# Altium PCB COMM_V3.PcbDoc (part 1 of 5)
Units mm, origin at the board's own origin, x right, y up, seen from the top; angles counter-clockwise.
Board outline 93 x 90 mm, 6 copper layers (Top Layer, L2_GND, L3_PWR, L4_SIG, L5_GND, Bottom Layer), stack 1.634 mm thick; 271 components, 237 nets, 1362 pads, 1090 vias.
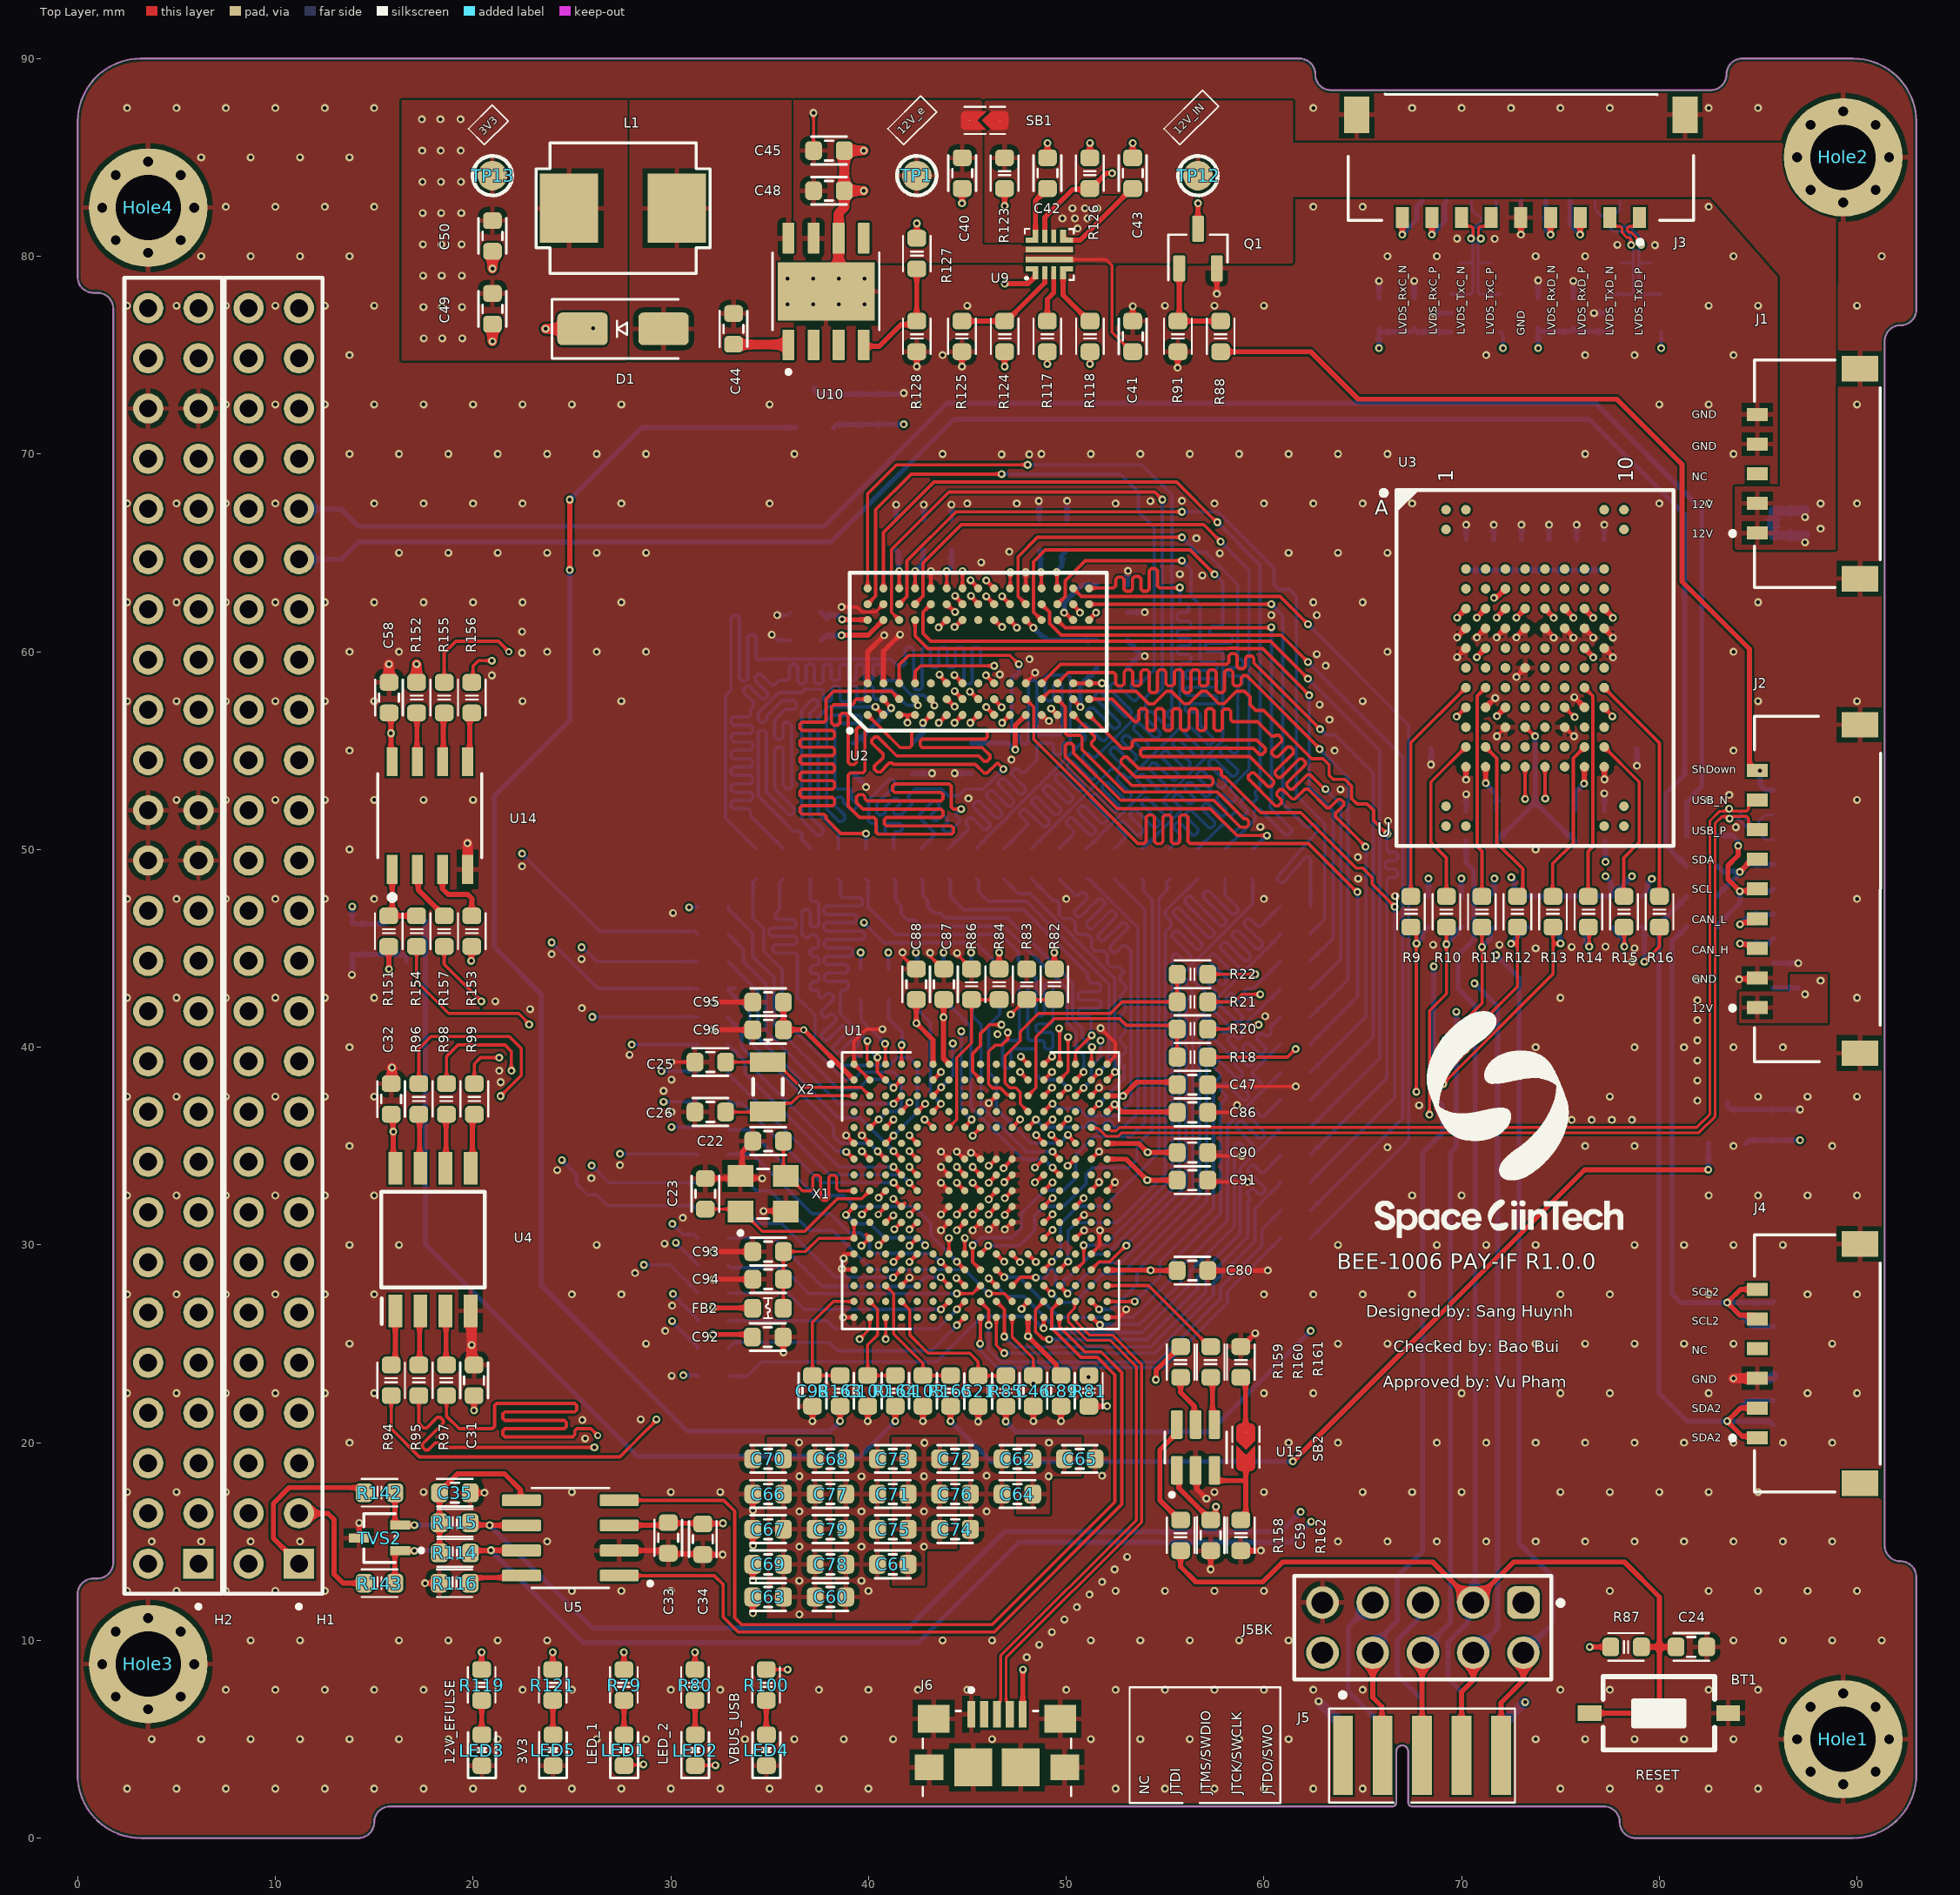
[diagram p0: Top Layer view]
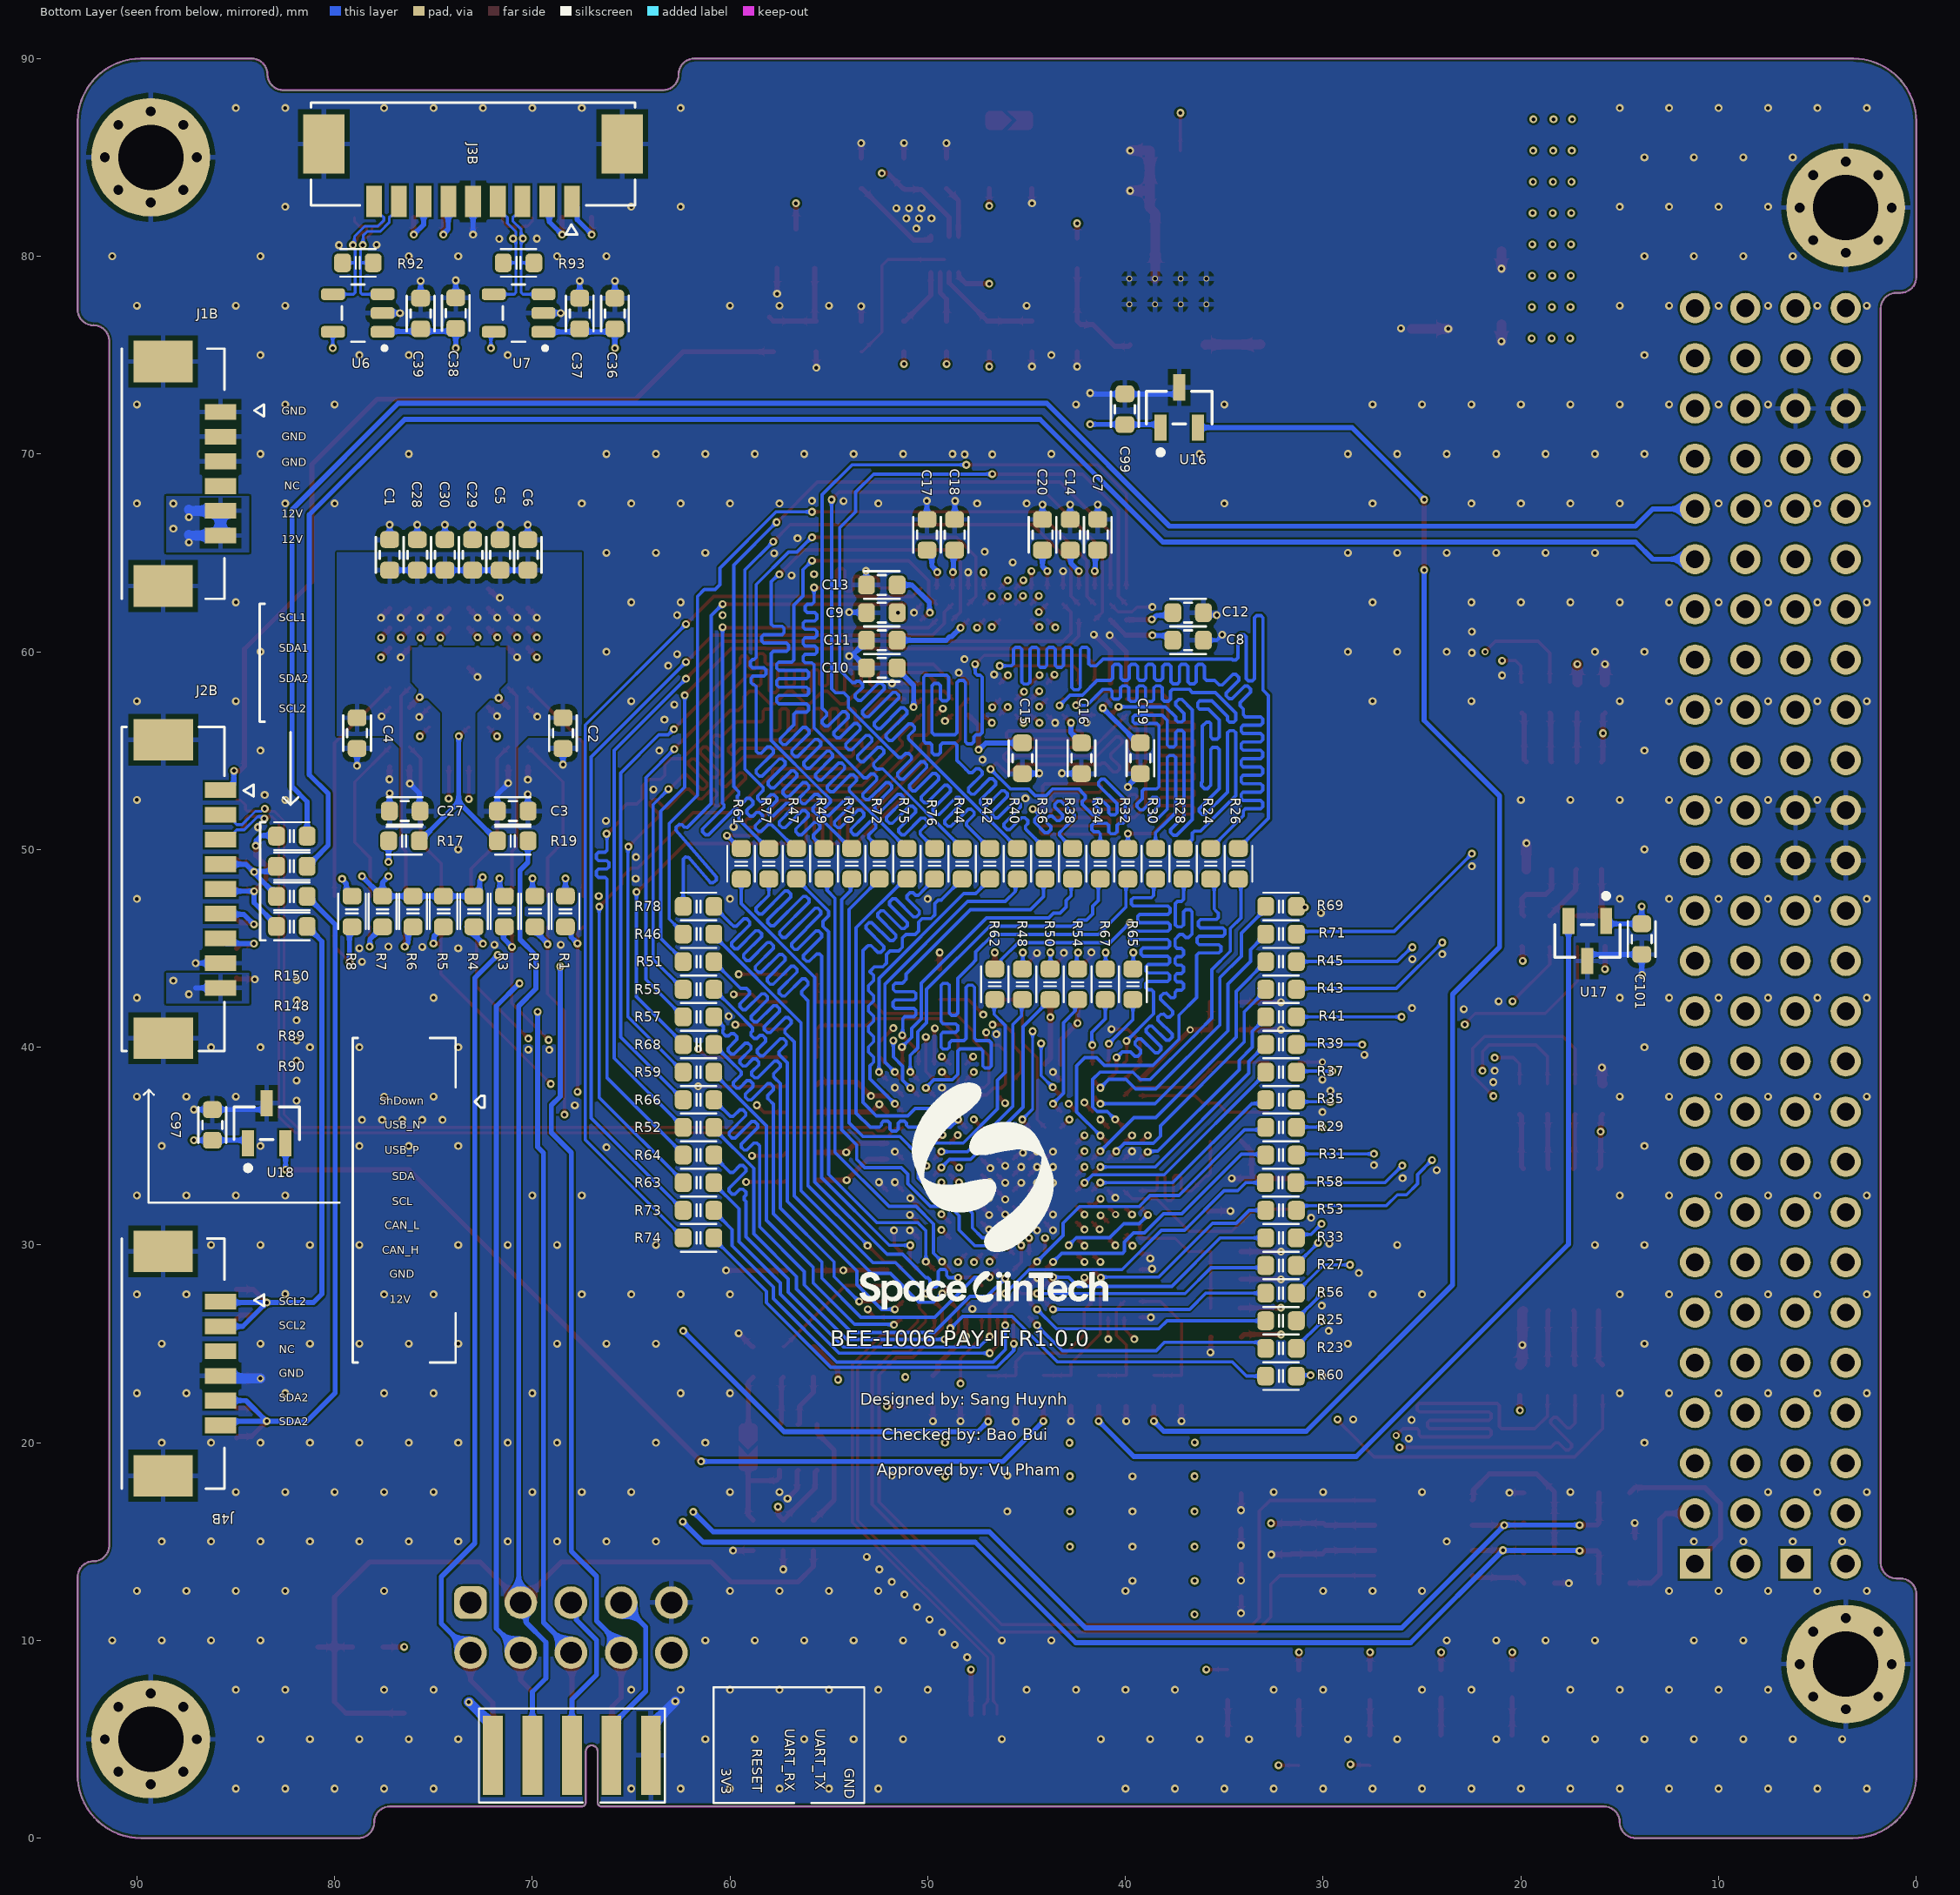
[diagram p1: Bottom Layer view, seen from below]
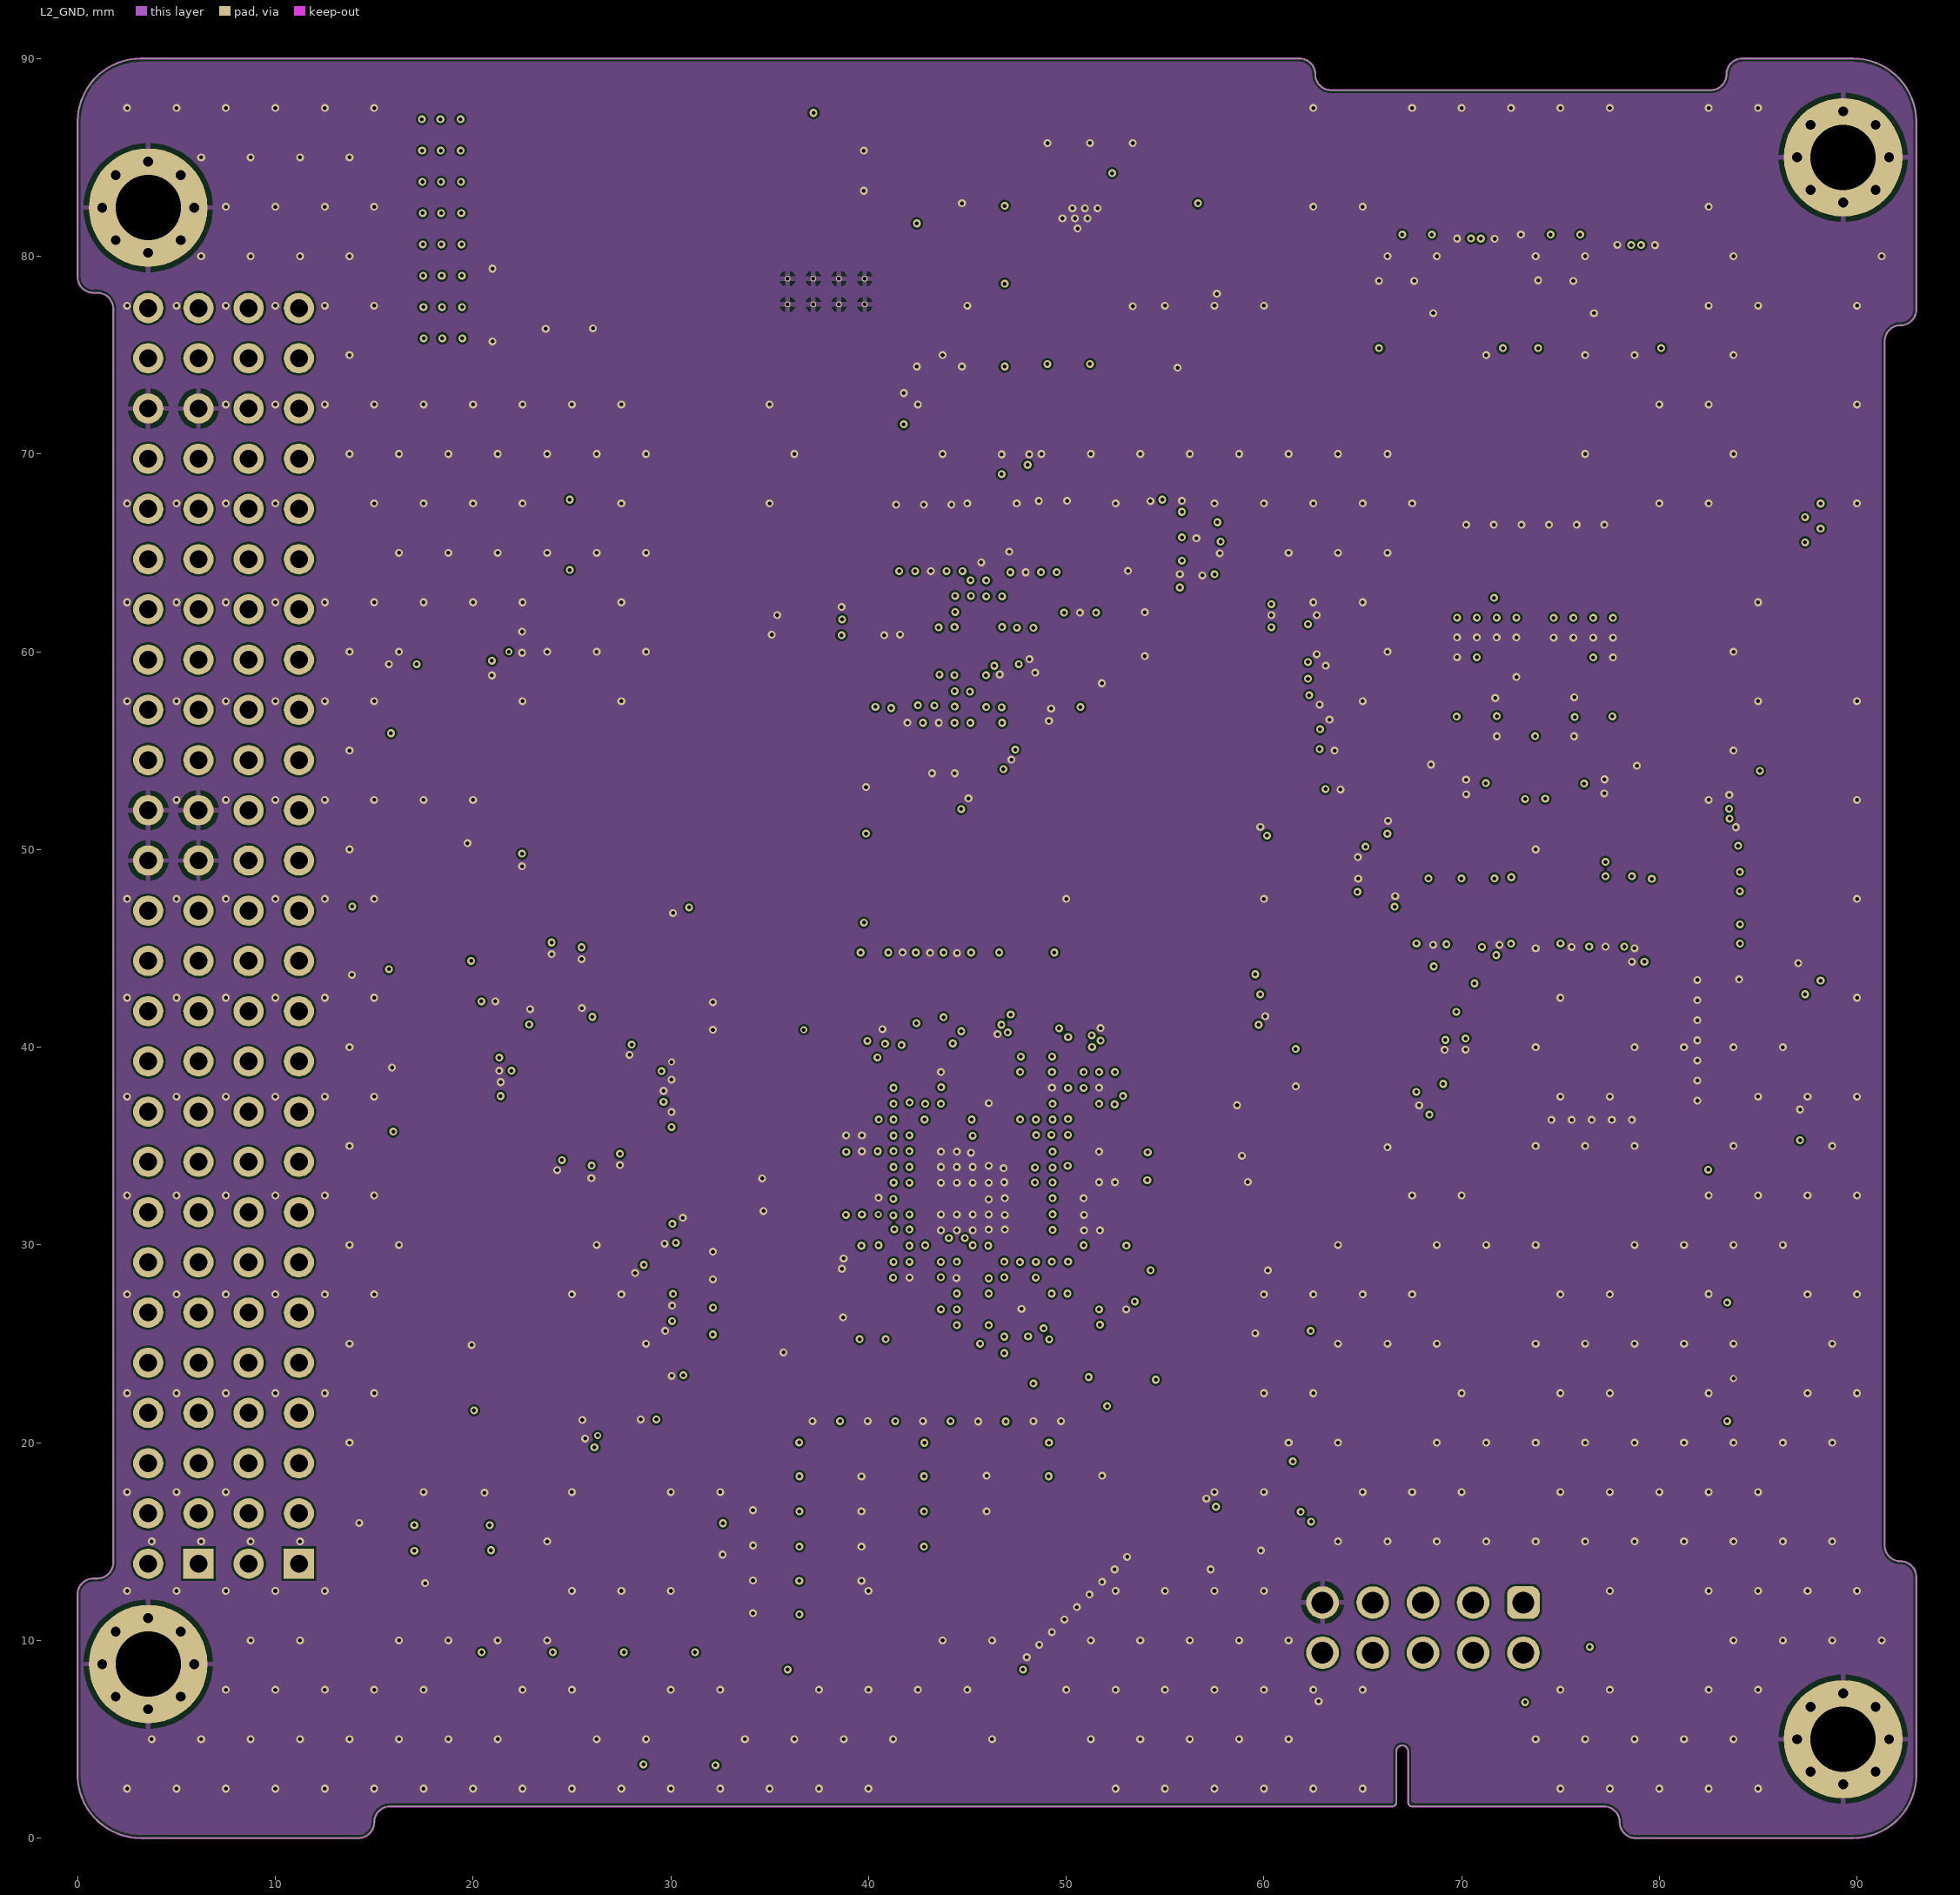
[diagram p2: L2_GND]
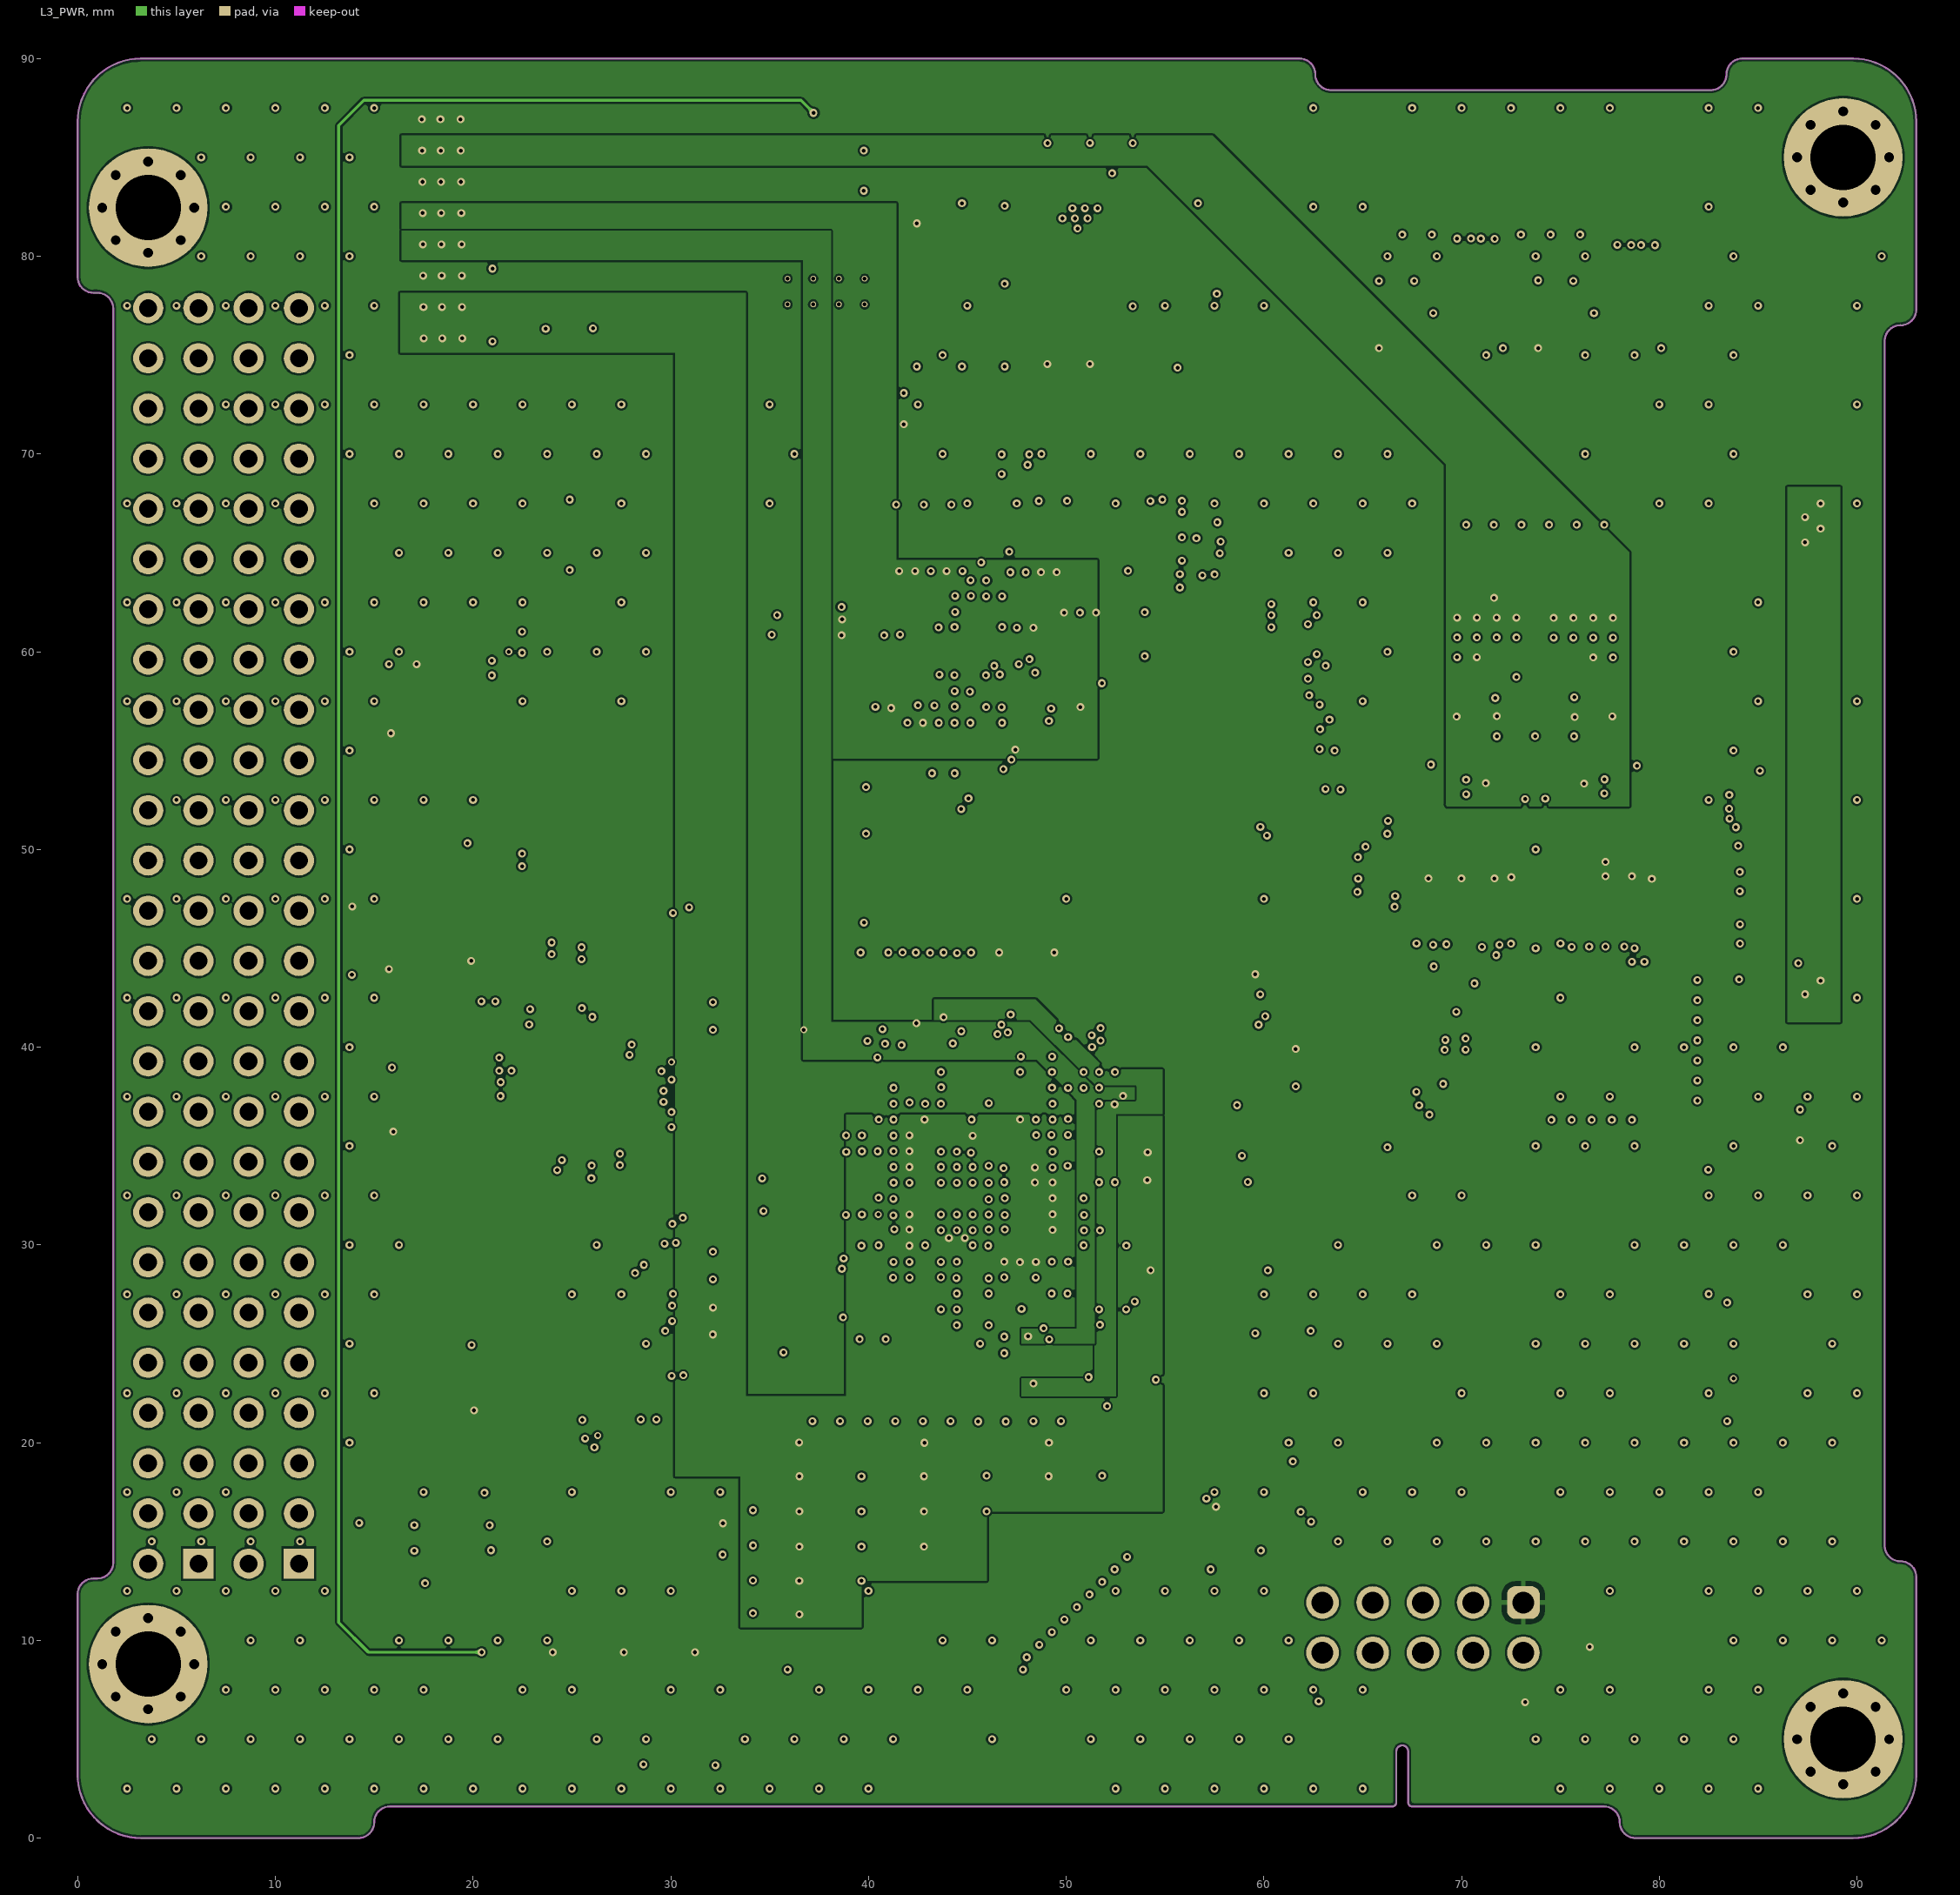
[diagram p3: L3_PWR]
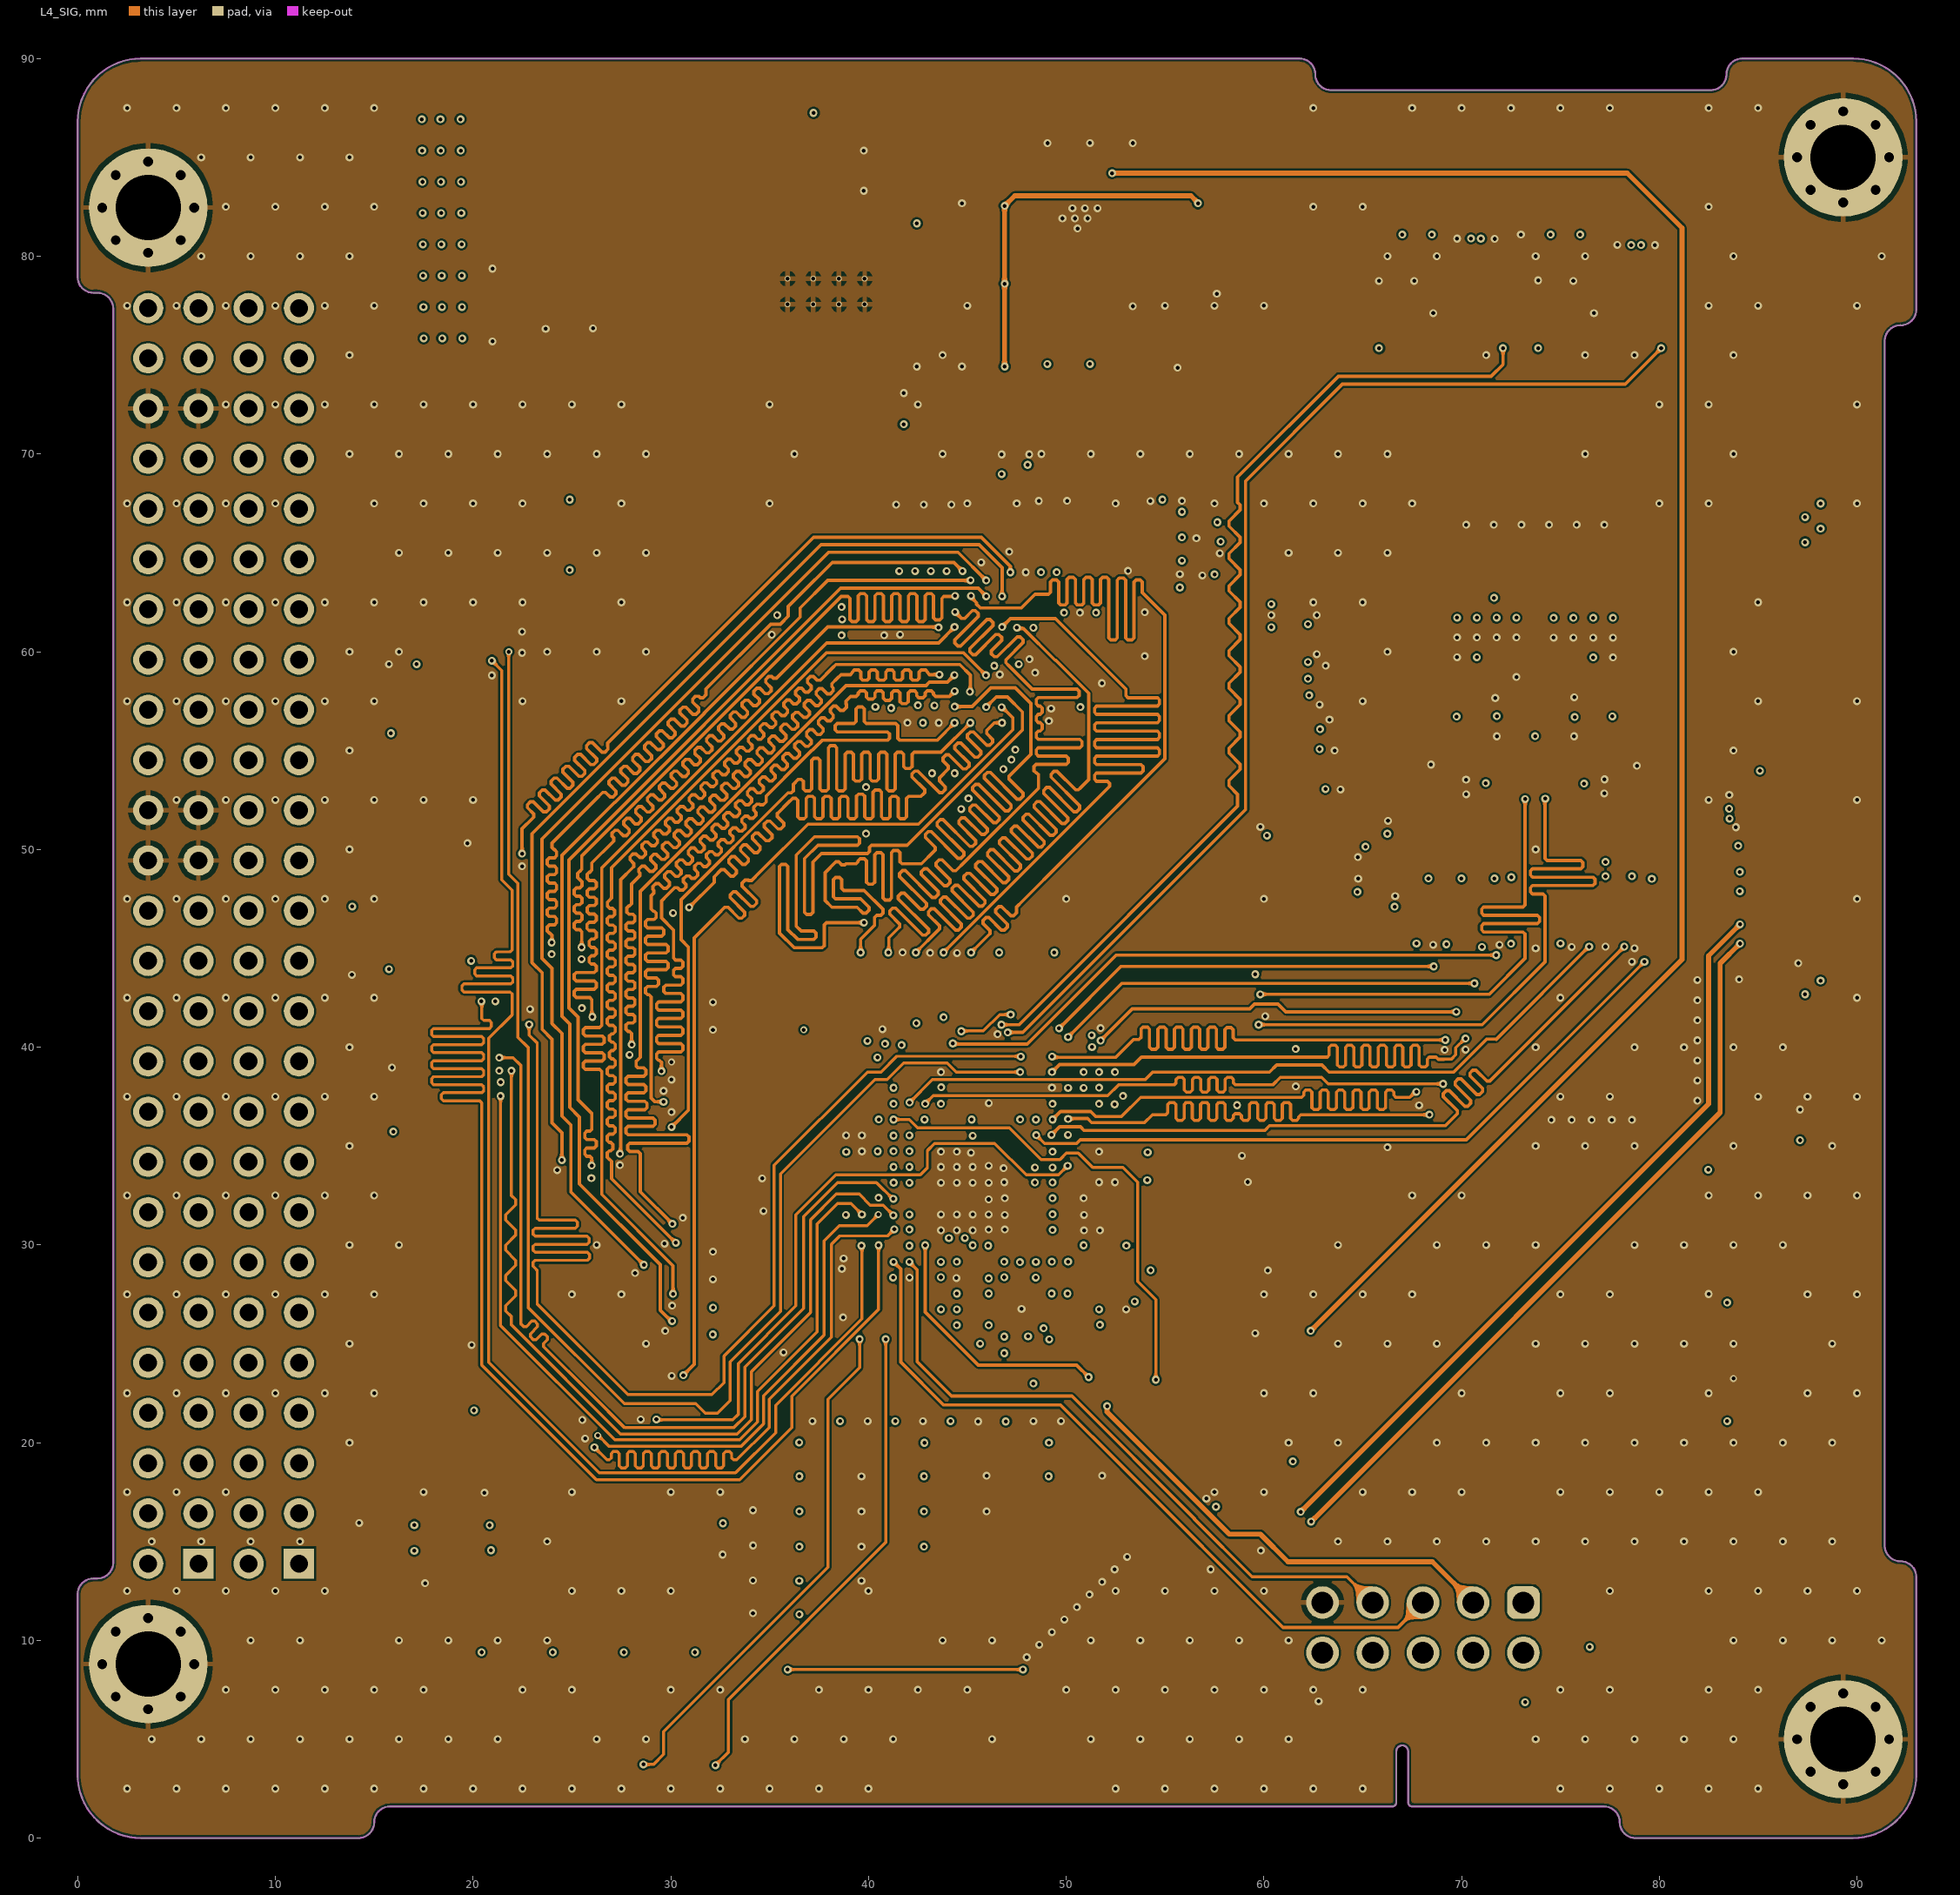
[diagram p4: L4_SIG]
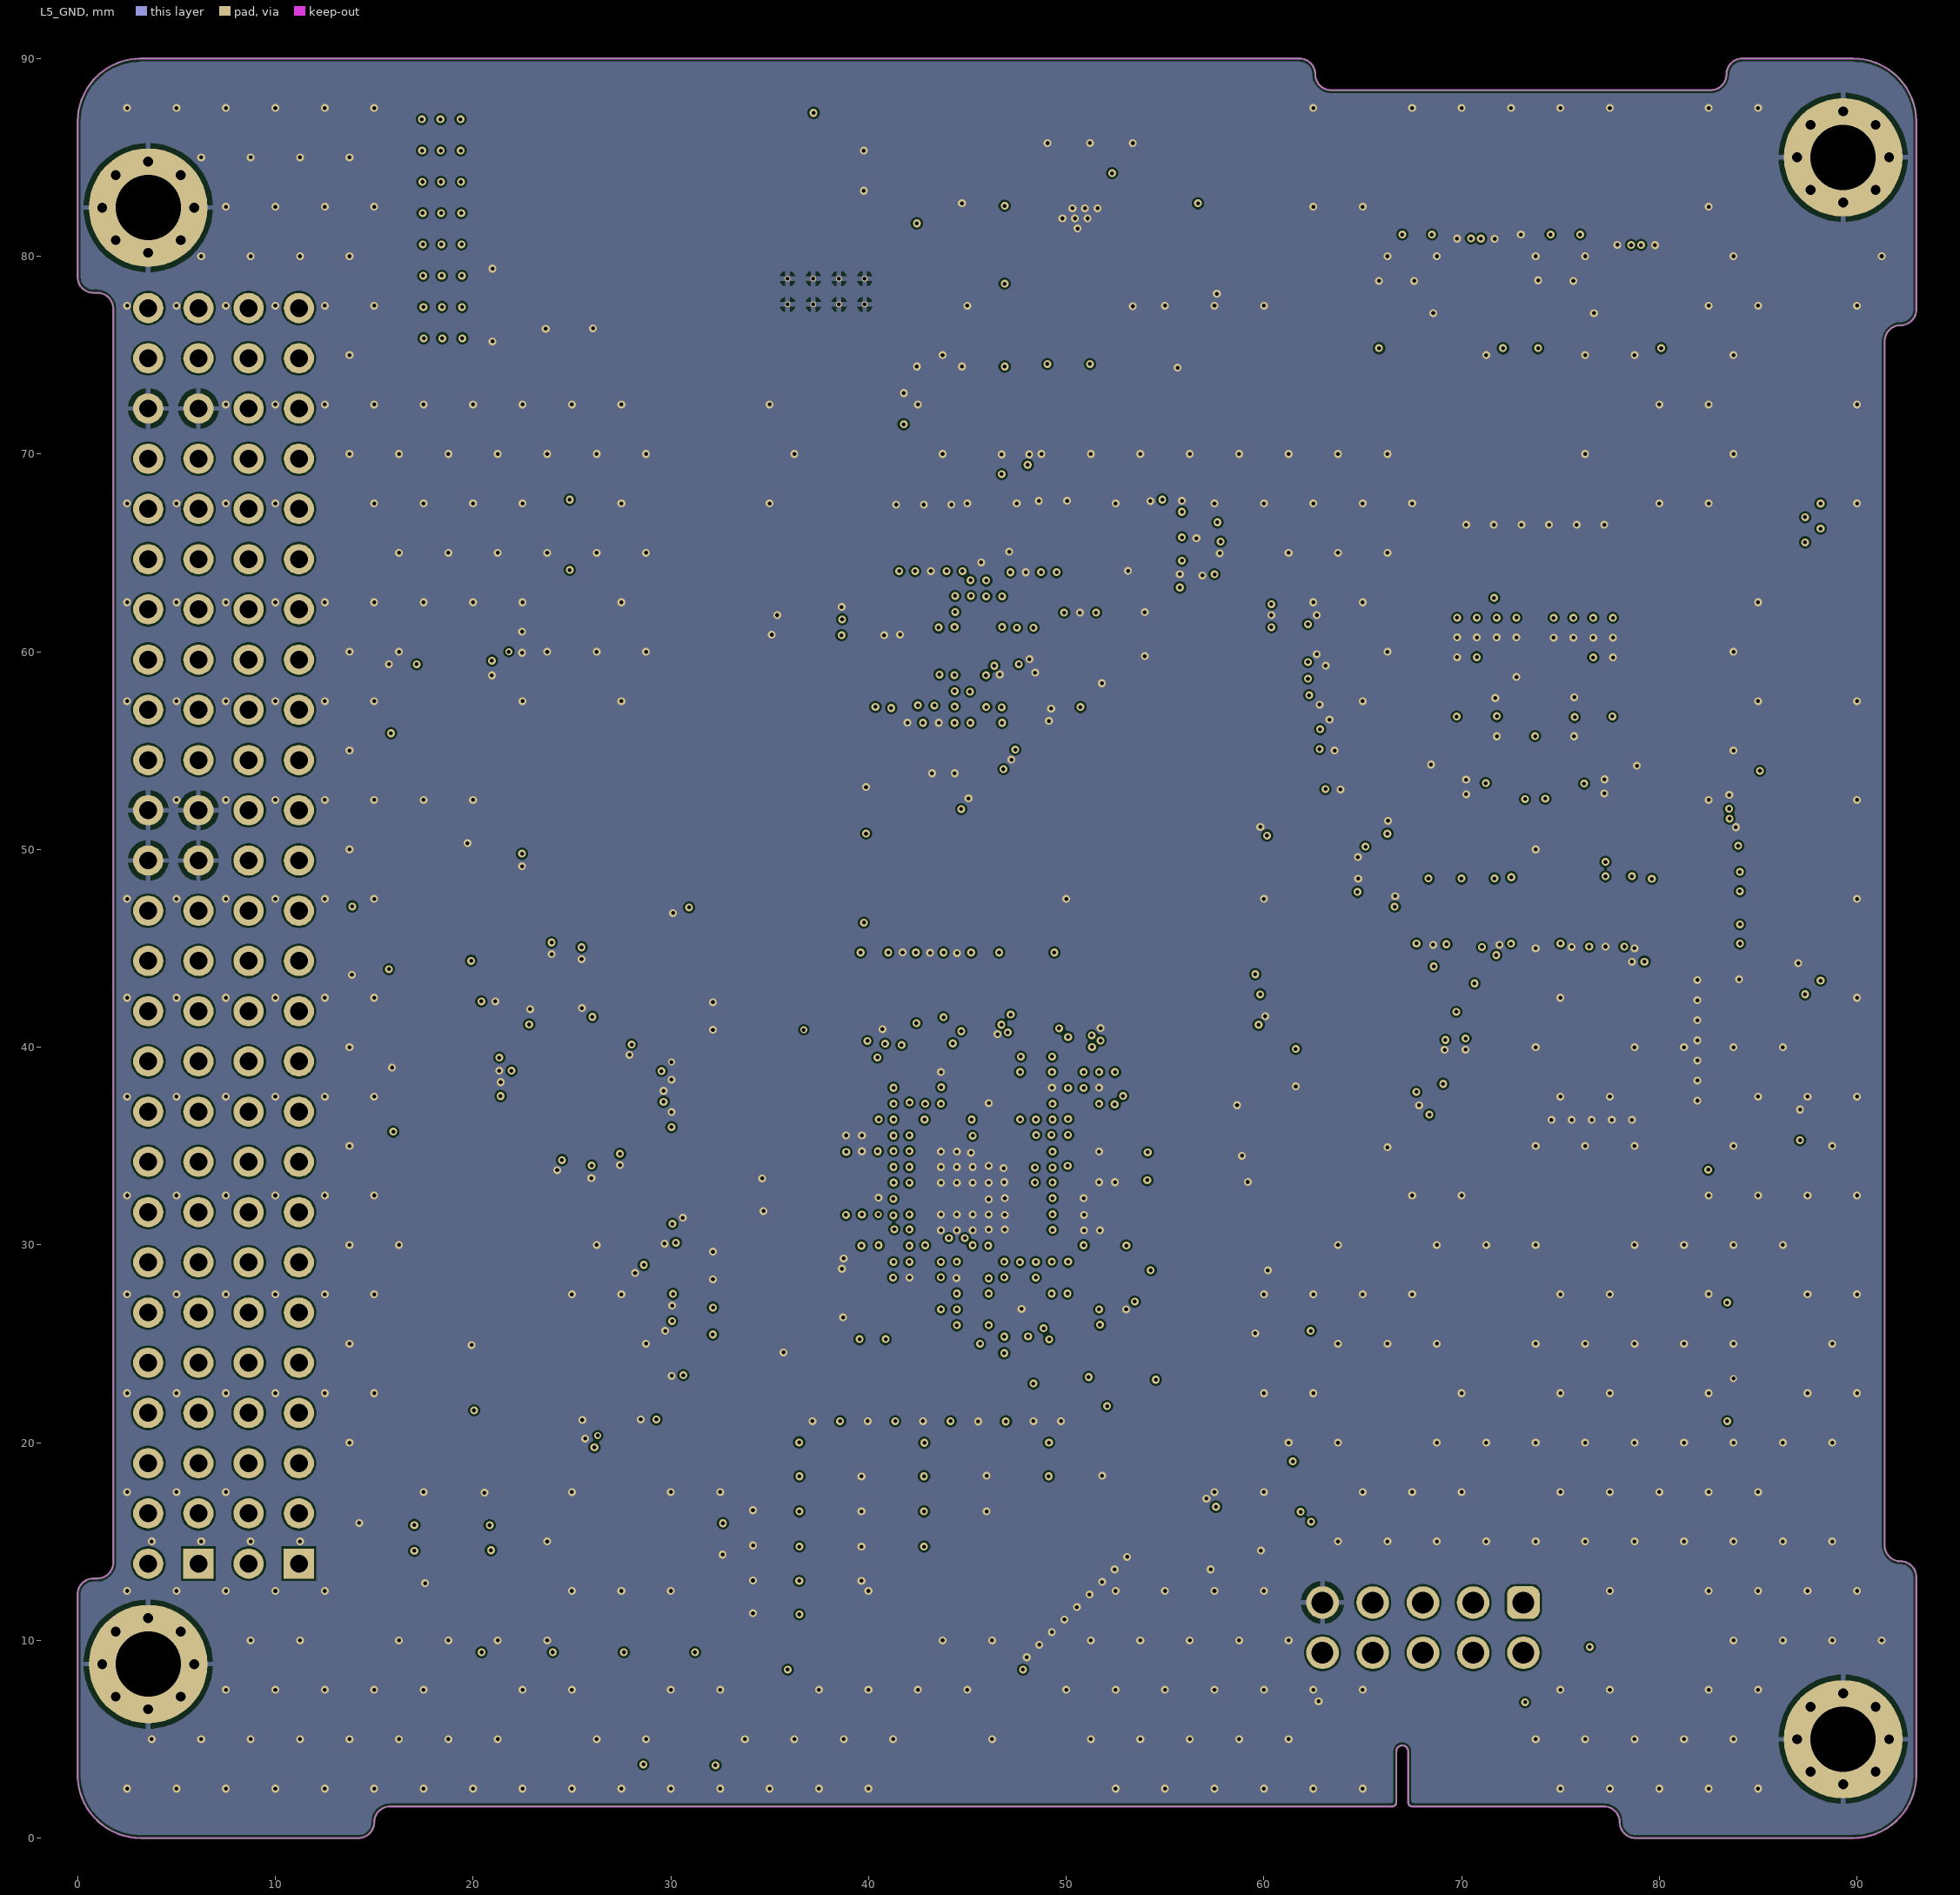
[diagram p5: L5_GND]
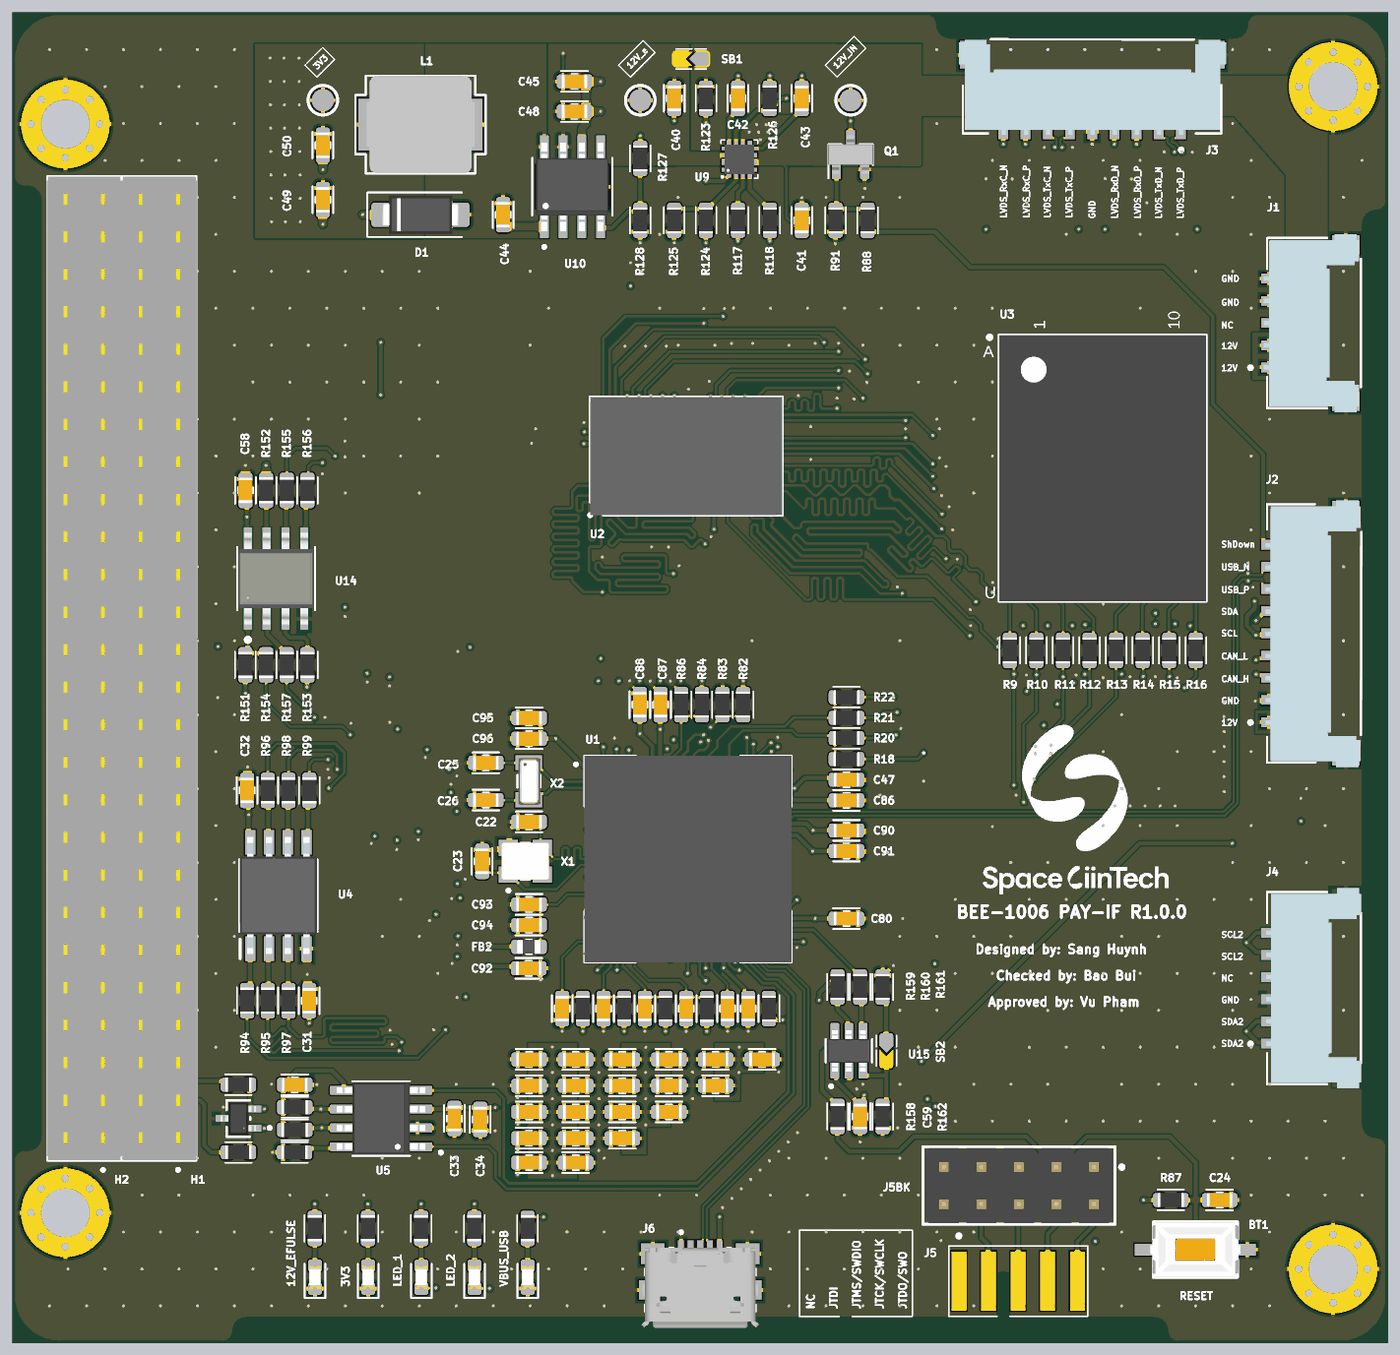
[diagram p10: 3D render of the assembled board from above, using the file's embedded part models]
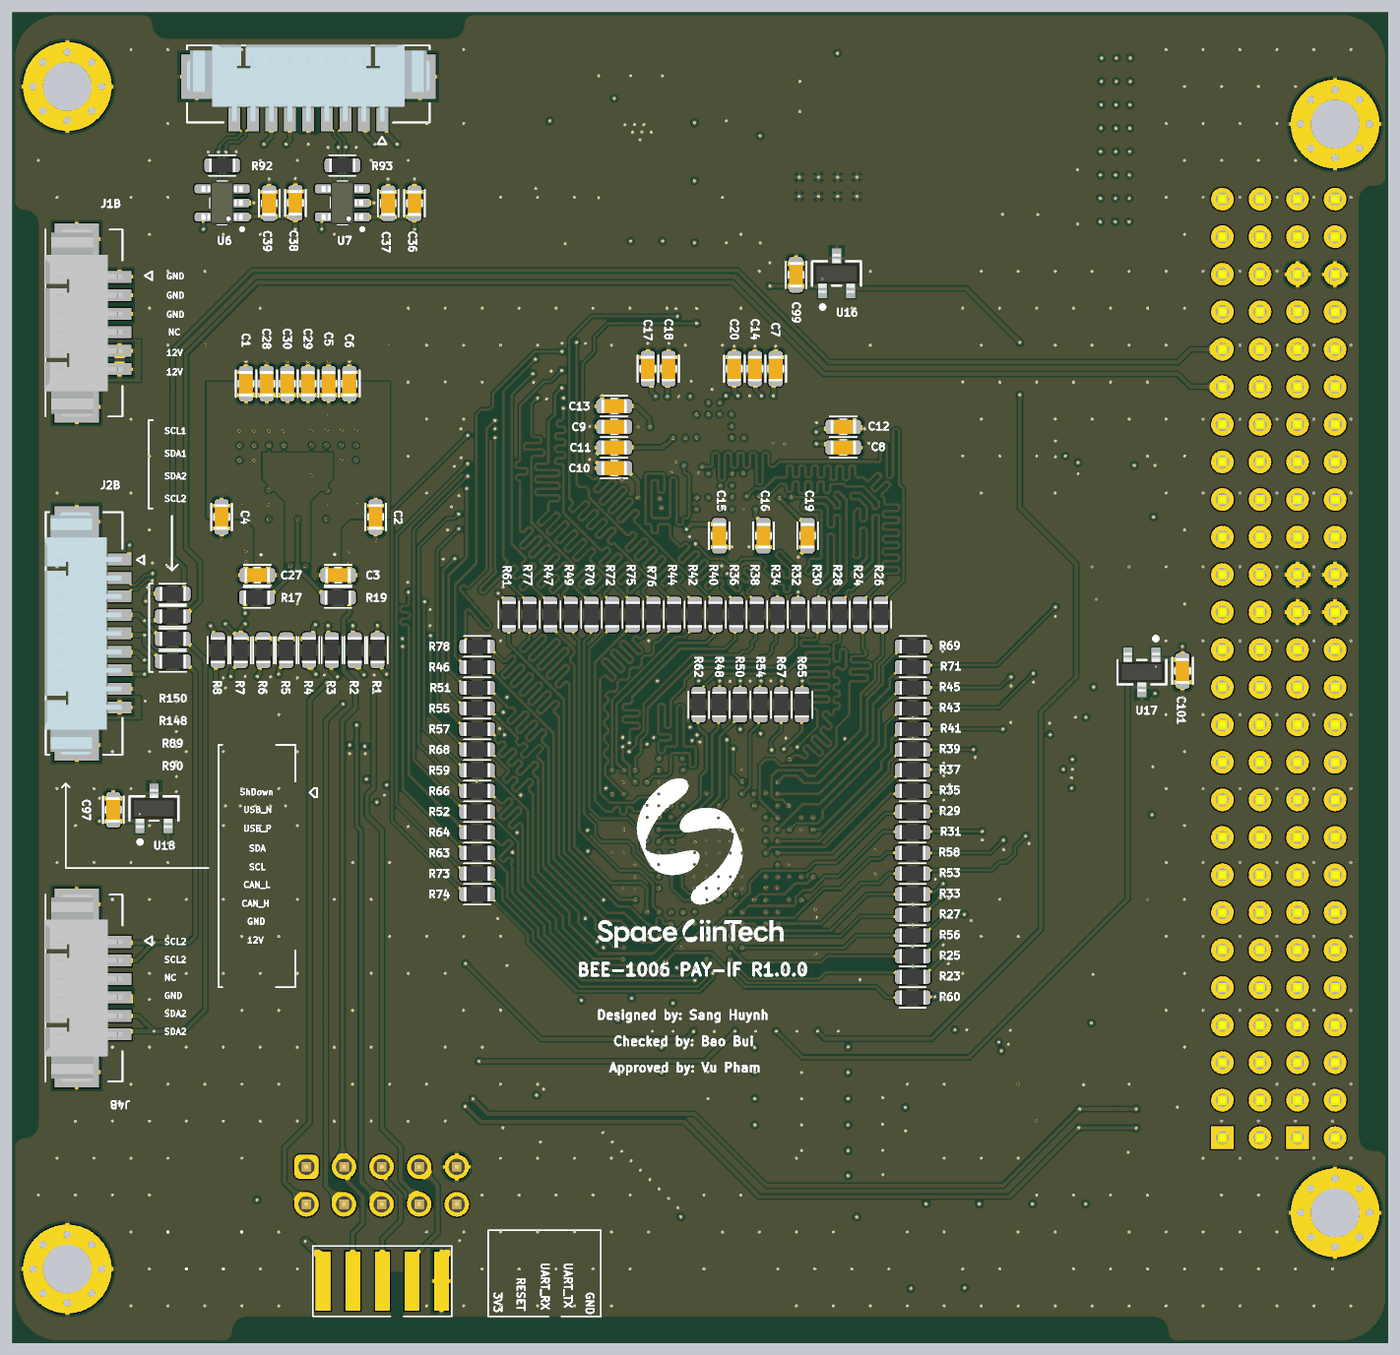
[diagram p11: 3D render of the assembled board from below, using the file's embedded part models]

## Layer stack, top to bottom
Top Solder: solder mask 0.0102, Solder Resist, Dk 3.5
Top Layer: signal copper 0.0457
Dielectric 2: core 0.0991, FR-4, Dk 3.9
L2_GND: signal copper 0.0305
Dielectric 3: prepreg 0.127, Dk 4.1
L3_PWR: signal copper 0.032
Dielectric 1: core 0.9652, FR-4, Dk 4.8
L4_SIG: signal copper 0.032
Dielectric 4: prepreg 0.127, Dk 4.1
L5_GND: signal copper 0.0305
Dielectric 5: core 0.0991, FR-4, Dk 3.9
Bottom Layer: signal copper 0.0457
Bottom Solder: solder mask 0.0102, Solder Resist, Dk 3.5

## Board outline
0,3.2 0,12.33 cw(c0.8,12.33) 0.8,13.13 1,13.13 ccw(c1,13.93) 1.8,13.93 1.8,77.35 ccw(c1,77.35) 1,78.15 0.8,78.15 cw(c0.8,78.95) 0,78.95 0,86.8 cw(c3.2,86.8) 3.193,90 3.2,90 61.8,90 cw(c61.8,89.2) 62.6,89.2 ccw(c63.4,89.2) 63.4,88.4 82.6,88.4 ccw(c82.6,89.2) 83.4,89.2 cw(c84.2,89.2) 84.2,90 89.8,90 89.807,90 cw(c89.8,86.8) 93,86.807 93,77.307 cw(c92.2,77.307) 92.2,76.507 ccw(c92.2,75.707) 91.4,75.707 91.4,14.8 ccw(c92.2,14.8) 92.2,14 cw(c92.2,13.2) 93,13.2 93,3.2 cw(c89.8,3.2) 89.8,0 78.8,0 cw(c78.8,0.8) 78,0.8 ccw(c77.2,0.8) 77.2,1.6 67.5,1.6 cw(c67.5,1.8) 67.3,1.8 67.3,4.387 ccw(c67,4.387) 66.7,4.387 66.7,1.8 cw(c66.5,1.8) 66.5,1.6 51,1.6 15.8,1.6 ccw(c15.8,0.8) 15,0.8 cw(c14.2,0.8) 14.2,0 3.2,0 cw(c3.2,3.2)

## Design rules (kind name [scope] priority, off if disabled: settings)
Clearance [All] p1: gap=0.102 ignorepadtopadclearanceinfootprint=TRUE
ComponentClearance ComponentClearance_PC104 [InComponent('H1') vs InComponent('H2')] p1: gap=0 collisioncheckmode=3 verticalgap=-15 showdistances=FALSE
ComponentClearance [All] p2: gap=0.254 collisioncheckmode=3 verticalgap=0.254 showdistances=FALSE
DiffPairsRouting DiffPairsRouting_USB [InDifferentialPairClass('All Differential Pairs')] p1: maxlimit=0.254 minlimit=0.127 mostfreqgap=0.127 toplayer_maxgap=0.127 toplayer_minwidth=0.141 toplayer_maxwidth=0.141 toplayer_prefwidth=0.141 midlayer2_maxgap=0.127 midlayer2_minwidth=0.093 midlayer2_maxwidth=0.093 midlayer2_prefwidth=0.093 midlayer3_maxgap=0.127 midlayer3_minwidth=0.093 midlayer3_maxwidth=0.093 midlayer3_prefwidth=0.093 bottomlayer_maxgap=0.127 bottomlayer_minwidth=0.141 bottomlayer_maxwidth=0.141 bottomlayer_prefwidth=0.141 impedanceprofiledriven=TRUE impedanceprofileid={6AAECBA1-2538-4FD8-8C3F-2CEA60D4070D} impedanceprofilevalue=90.000000 maxuncoupledlength=12.7
DiffPairsRouting DiffPairsRouting_LVDS [InDifferentialPairClass('Diff_LVDS')] p2: maxlimit=0.127 minlimit=0.127 mostfreqgap=0.127 toplayer_minwidth=0.141 toplayer_maxwidth=0.141 toplayer_prefwidth=0.141 midlayer2_minwidth=0.093 midlayer2_maxwidth=0.093 midlayer2_prefwidth=0.093 midlayer3_minwidth=0.093 midlayer3_maxwidth=0.093 midlayer3_prefwidth=0.093 bottomlayer_minwidth=0.141 bottomlayer_maxwidth=0.141 bottomlayer_prefwidth=0.141 impedanceprofiledriven=TRUE impedanceprofileid={6AAECBA1-2538-4FD8-8C3F-2CEA60D4070D} impedanceprofilevalue=90.000000 maxuncoupledlength=12.7
DiffPairsRouting [All] p3: maxlimit=0.254 minlimit=0.127 mostfreqgap=0.127 toplayer_maxgap=0.127 toplayer_minwidth=0.141 toplayer_maxwidth=0.141 toplayer_prefwidth=0.141 midlayer2_maxgap=0.127 midlayer2_minwidth=0.093 midlayer2_maxwidth=0.093 midlayer2_prefwidth=0.093 midlayer3_maxgap=0.127 midlayer3_minwidth=0.093 midlayer3_maxwidth=0.093 midlayer3_prefwidth=0.093 bottomlayer_maxgap=0.127 bottomlayer_minwidth=0.141 bottomlayer_maxwidth=0.141 bottomlayer_prefwidth=0.141 impedanceprofiledriven=TRUE impedanceprofileid={6AAECBA1-2538-4FD8-8C3F-2CEA60D4070D} impedanceprofilevalue=90.000000 maxuncoupledlength=12.7
HoleSize [All] p1: absolutevalues=TRUE maxlimit=5 minlimit=0.025 maxpercent=80.000 minpercent=20.000
HoleToHoleClearance [All] p1: gap=0.15 allowstackedmicrovias=TRUE
MatchedLengths MatchedLengths_FRAM [InxSignalClass('FRAM')] p1: tolerance=2.54 checknetsindiffpair=FALSE checkdiffpairvsdiffpair=TRUE checkxsignals=TRUE checkothers=TRUE
MatchedLengths MatchedLengths_MRAM [InxSignalClass('MRAM')] p2: tolerance=5 checknetsindiffpair=FALSE checkdiffpairvsdiffpair=TRUE checkxsignals=TRUE checkothers=TRUE
MatchedLengths MatchedLengths_LVDS_SPI [InNetClass('LVDS_SPI')] p3: tolerance=2.54 checknetsindiffpair=FALSE checkdiffpairvsdiffpair=TRUE checkxsignals=TRUE checkothers=TRUE
MatchedLengths MatchedLengths_SDRAM [InxSignalClass('SDRAM')] p4: tolerance=5 checknetsindiffpair=FALSE checkdiffpairvsdiffpair=TRUE checkxsignals=TRUE checkothers=TRUE
MatchedLengths MatchedLengths_SDRAM_A&BA [InxSignalClass('SDRAM_A&BA')] p5: tolerance=2.54 checknetsindiffpair=FALSE checkdiffpairvsdiffpair=TRUE checkxsignals=TRUE checkothers=TRUE
MatchedLengths MatchedLengths_eMMC [InxSignalClass('eMMC')] p6: tolerance=2.54 checknetsindiffpair=FALSE checkdiffpairvsdiffpair=TRUE checkxsignals=TRUE checkothers=TRUE
MatchedLengths MatchedLengths_SDRAM_D [InxSignalClass('SDRAM_D')] p7: tolerance=2.54 checknetsindiffpair=FALSE checkdiffpairvsdiffpair=TRUE checkxsignals=TRUE checkothers=TRUE
MinimumSolderMaskSliver [All] p1: minsoldermaskwidth=0.11
PolygonConnect PolygonConnect_Vias [IsVia] p1: connectstyle=Direct reliefconductorwidth=0.254 reliefentries=4 polygonreliefangle="90 Angle" airgapwidth=0.254
PolygonConnect [All] p2: connectstyle=Relief reliefconductorwidth=0.254 reliefentries=4 polygonreliefangle="90 Angle" airgapwidth=0.254
RoutingVias [All] p1: holewidth=0.2 width=0.35 viastyle="Through Hole" minholewidth=0.2 minwidth=0.35 maxholewidth=0.4 maxwidth=0.5
SilkToSilkClearance [All] p1: silktosilkclearance=0.127
SilkToSolderMaskClearance [IsPad] p1: minsilkscreentomaskgap=0.11 clearancetoexposedcopper=TRUE
SolderMaskExpansion SolderMaskExpansion_Vias [IsVia] p1: expansion=0.102 istentingtop=TRUE
SolderMaskExpansion [All] p2: expansion=0.102 istentingtop=FALSE
Width Width_S50 [InNetClass('Single_Ended')] p1: maxlimit=0.17 minlimit=0.15 preferedwidth=0.254 toplayer_minwidth=0.168 toplayer_prefwidth=0.169 midlayer2_minwidth=0.151 midlayer2_maxwidth=0.153 midlayer2_prefwidth=0.152 midlayer3_minwidth=0.151 midlayer3_maxwidth=0.153 midlayer3_prefwidth=0.152 bottomlayer_minwidth=0.168 bottomlayer_prefwidth=0.169 impedanceprofiledriven=TRUE impedanceprofileid={9A71E23D-52CF-4875-86DD-583C4774CC7E} impedanceprofilevalue=50.000000 minimp=50.000000 maximp=50.000000 favimp=50.000000 checkconnectedcopper=TRUE
Width [All] p2: maxlimit=0.5 minlimit=0.152 preferedwidth=0.254
23 further rules are at their usual default settings.

## Classes and differential pairs
net class N000-1_[0..3]: MRAM_IO0 MRAM_IO1 MRAM_IO2 MRAM_IO3
component class MRAM: C31 C32 R94 R95 R96 R97 R98 R99 U4
component class TEMP_CTRL: C97 C98 C99 C100 C101 C103 R163 R164 R165 U16 U17 U18
net class SDRAM_D[0..31]: SDRAM_D0 SDRAM_D1 SDRAM_D2 SDRAM_D3 SDRAM_D4 SDRAM_D5 SDRAM_D6 SDRAM_D7 SDRAM_D8 SDRAM_D9 SDRAM_D10 SDRAM_D11 SDRAM_D12 SDRAM_D13 SDRAM_D14 SDRAM_D15 SDRAM_D16 SDRAM_D17 SDRAM_D18 SDRAM_D19 SDRAM_D20 SDRAM_D21 SDRAM_D22 SDRAM_D23 SDRAM_D24 SDRAM_D25 SDRAM_D26 SDRAM_D27 SDRAM_D28 SDRAM_D29 SDRAM_D30 SDRAM_D31
net class SDRAM_A[0..11]: SDRAM_A0 SDRAM_A1 SDRAM_A2 SDRAM_A3 SDRAM_A4 SDRAM_A5 SDRAM_A6 SDRAM_A7 SDRAM_A8 SDRAM_A9 SDRAM_A10 SDRAM_A11
net class SDIO1_D[0..7]: SDIO1_D0 SDIO1_D1 SDIO1_D2 SDIO1_D3 SDIO1_D4 SDIO1_D5 SDIO1_D6 SDIO1_D7
component class WATCHDOG: C59 R158 R159 R160 R161 R162 SB2 U15
component class USB_FS: g J6 LED4 R100
component class SDRAM: C7 C8 C9 C10 C11 C12 C13 C14 C15 C16 C17 C18 C19 C20 R23 R24 R25 R26 R27 R28 R29 R30 R31 R32 R33 R34 R35 R36 R37 R38 R39 R40 R41 R42 R43 R44 R45 R46 R47 R48 R49 R50 R51 R52 R53 R54 R55 R56 R57 R58 R59 R60 R61 R62 R63 R64 R65 R66 R67 R68 R69 R70 R71 R72 R73 R74 R75 R76 R77 R78 U2
component class POWER: C40 C41 C42 C43 C44 C45 C48 C49 C50 D1 J1 J1B L1 LED3 LED5 Q1 R88 R91 R117 R118 R119 R121 R123 R124 R125 R126 R127 R128 SB1 TP1 TP12 TP13 U9 U10
component class MCU: BT1 C21 C22 C23 C24 C25 C26 LED1 LED2 R79 R80 R81 R82 R83 R84 R85 R86 R87 U1 X1 X2
component class MCU_POWER: C46 C47 C60 C61 C62 C63 C64 C65 C66 C67 C68 C69 C70 C71 C72 C73 C74 C75 C76 C77 C78 C79 C80 C86 C87 C88 C89 C90 C91 C92 C93 C94 C95 C96 FB2
component class LVDS: 2 C36 C37 C38 C39 J3 J3B R92 R93 U6 U7
component class FRAM: C58 R151 R152 R153 R154 R155 R156 R157 U14
component class eMMC: C1 C2 C3 C4 C5 C6 C27 C28 C29 C30 R1 R2 R3 R4 R5 R6 R7 R8 R9 R10 R11 R12 R13 R14 R15 R16 R17 R18 R19 R20 R21 R22 U3
component class DEBUG: J5 J5BK
component class CONNECTOR: H1 H2 Hole1 Hole2 Hole3 Hole4 J2 J2B J4 J4B R89 R90 R142 R143 R148 R150
component class CAN: C33 C34 C35 R114 R115 R116 TVS2 U5
differential pair EXP_USB_FS: +EXP_USB_FS_P -EXP_USB_FS_N
differential pair COMM_USB_FS: +COMM_USB_FS_P -COMM_USB_FS_N
differential pair LVDS_TxD: +LVDS_TxD_P -LVDS_TxD_N
differential pair LVDS_TxC: +LVDS_TxC_P -LVDS_TxC_N

## Components (designator, comment, footprint, x,y, rotation, side; value= is the part's Value field where it differs from the comment)
BT1 "BT_NRST" SW2-SMD 79.982,6.314 r180 top value="SW chip 2 pin"
C1 "0.1uF/16V" CAP_C_1608X80 77.216,64.897 r270 bottom value=33pF
C2 "0.1uF/16V" CAP_C_1608X80 68.453,55.88 r90 bottom value=33pF
C3 "0.1uF/16V" CAP_C_1608X80 70.993,51.943 r0 bottom value=33pF
C4 "0.1uF/16V" CAP_C_1608X80 78.867,55.88 r90 bottom value=33pF
C5 "0.1uF/16V" CAP_C_1608X80 71.628,64.897 r270 bottom value=33pF
C6 "0.1uF/16V" CAP_C_1608X80 70.231,64.897 r270 bottom value=33pF
C7 "0.1uF/16V" CAP_C_1608X80 41.402,65.913 r270 bottom value=33pF
C8 "0.1uF/16V" CAP_C_1608X80 36.83,60.579 r0 bottom value=33pF
C9 "0.1uF/16V" CAP_C_1608X80 52.324,61.976 r180 bottom value=33pF
C10 "0.1uF/16V" CAP_C_1608X80 52.324,59.182 r180 bottom value=33pF
C11 "0.1uF/16V" CAP_C_1608X80 52.324,60.579 r180 bottom value=33pF
C12 "0.1uF/16V" CAP_C_1608X80 36.83,61.976 r0 bottom value=33pF
C13 "0.1uF/16V" CAP_C_1608X80 52.324,63.373 r180 bottom value=33pF
C14 "0.1uF/16V" CAP_C_1608X80 42.799,65.913 r270 bottom value=33pF
C15 "0.1uF/16V" CAP_C_1608X80 45.212,54.61 r90 bottom value=33pF
C16 "0.1uF/16V" CAP_C_1608X80 42.227,54.61 r90 bottom value=33pF
C17 "0.1uF/16V" CAP_C_1608X80 50.038,65.913 r270 bottom value=33pF
C18 "0.1uF/16V" CAP_C_1608X80 48.641,65.913 r270 bottom value=33pF
C19 "0.1uF/16V" CAP_C_1608X80 39.243,54.61 r90 bottom value=33pF
C20 "0.1uF/16V" CAP_C_1608X80 44.196,65.913 r270 bottom value=33pF
C21 "0.1uF/16V" CAP_C_1608X80 45.551,22.606 r90 top value=33pF
C22 "12pF/10V" CAP_C_1608X80 34.925,35.25 r0 top value=33pF
C23 "12pF/10V" CAP_C_1608X80 31.75,32.583 r270 top value=33pF
C24 "0.1uF/16V" CAP_C_1608X80 81.622,9.667 r180 top value=33pF
C25 "12pF/10V" CAP_C_1608X80 32,39.245 r0 top value=33pF
C26 "12pF/10V" CAP_C_1608X80 32,36.722 r0 top value=33pF
C27 "0.1uF/16V" CAP_C_1608X80 76.454,51.943 r180 bottom value=33pF
C28 "0.1uF/16V" CAP_C_1608X80 75.819,64.897 r270 bottom value=33pF
C29 "2.2uF/10V" CAP_C_1608X80 73.025,64.897 r270 bottom value=33pF
C30 "0.1uF/16V" CAP_C_1608X80 74.422,64.897 r270 bottom value=33pF
C31 "0.1uF/16V" CAP_C_1608X80 20.051,23.154 r270 top value=33pF
C32 "0.1uF/16V" CAP_C_1608X80 15.86,37.378 r270 top value=33pF
C33 "1uF/25V" CAP_C_1608X80 29.875,15.179 r270 top value=33pF
C34 "0.1uF/16V" CAP_C_1608X80 31.623,15.113 r270 top value=33pF
C35 "4.7nF/16V" CAP_C_1608X80 19.08,17.465 r0 top value=33pF
C36 "10uF/25V" CAP_C_1608X80 65.826,77.104 r270 bottom value=33pF
C37 "1uF/16V" CAP_C_1608X80 67.604,77.104 r270 bottom value=33pF
C38 "10uF/25V" CAP_C_1608X80 73.874,77.127 r270 bottom value=33pF
C39 "1uF/16V" CAP_C_1608X80 75.652,77.104 r270 bottom value=33pF
C40 "10uF/25V" CAP_C_1608X80 44.743,84.201 r90 top value=33pF
C41 "10uF/25V" CAP_C_1608X80 53.366,75.946 r270 top value=33pF
C42 "2.2nF/25V" CAP_C_1608X80 49.054,84.201 r270 top
C43 "2.2nF/25V" CAP_C_1608X80 53.366,84.201 r270 top
C44 "10nF/16V" CAP_C_1608X80 33.173,76.327 r270 top value=33pF
C45 "10uF/25V" CAP_C_1608X80 37.999,85.344 r180 top value=33pF
C46 "2.2uF/10V" CAP_C_1608X80 48.343,22.618 r90 top value=33pF
C47 "4.7uF/16V" CAP_C_1608X80 56.388,38.1 r0 top value=33pF
C48 "1uF/25V" CAP_C_1608X80 37.999,83.312 r180 top value=33pF
C49 "10uF/25V" CAP_C_1608X80 20.981,77.343 r90 top value=33pF
C50 "1uF/25V" CAP_C_1608X80 20.981,81.026 r90 top value=33pF
C58 "0.1uF/16V" CAP_C_1608X80 15.748,57.679 r270 top value=33pF
C59 "0.1uF/16V" CAP_C_1608X80 57.311,15.314 r90 top value=33pF
C60 "0.1uF/16V" CAP_C_1608X80 38.077,12.192 r180 top value=33pF
C61 "0.1uF/16V" CAP_C_1608X80 41.229,13.843 r0 top value=33pF
C62 "0.1uF/16V" CAP_C_1608X80 47.534,19.177 r0 top value=33pF
C63 "0.1uF/16V" CAP_C_1608X80 34.925,12.192 r0 top value=33pF
C64 "0.1uF/16V" CAP_C_1608X80 47.534,17.399 r0 top value=33pF
C65 "0.1uF/16V" CAP_C_1608X80 50.686,19.177 r180 top value=33pF
C66 "0.1uF/16V" CAP_C_1608X80 34.925,17.399 r0 top value=33pF
C67 "0.1uF/16V" CAP_C_1608X80 34.925,15.621 r0 top value=33pF
C68 "0.1uF/16V" CAP_C_1608X80 38.077,19.177 r180 top value=33pF
C69 "0.1uF/16V" CAP_C_1608X80 34.925,13.843 r0 top value=33pF
C70 "4.7uF/16V" CAP_C_1608X80 34.925,19.177 r180 top value=33pF
C71 "0.1uF/16V" CAP_C_1608X80 41.229,17.399 r0 top value=33pF
C72 "0.1uF/16V" CAP_C_1608X80 44.382,19.177 r180 top value=33pF
C73 "0.1uF/16V" CAP_C_1608X80 41.229,19.177 r0 top value=33pF
C74 "0.1uF/16V" CAP_C_1608X80 44.382,15.621 r180 top value=33pF
C75 "0.1uF/16V" CAP_C_1608X80 41.229,15.621 r0 top value=33pF
C76 "0.1uF/16V" CAP_C_1608X80 44.382,17.399 r180 top value=33pF
C77 "0.1uF/16V" CAP_C_1608X80 38.077,17.399 r180 top value=33pF
C78 "0.1uF/16V" CAP_C_1608X80 38.077,13.843 r180 top value=33pF
C79 "0.1uF/16V" CAP_C_1608X80 38.077,15.621 r180 top value=33pF
C80 "0.1uF/16V" CAP_C_1608X80 56.388,28.702 r180 top value=33pF
C86 "2.2uF/10V" CAP_C_1608X80 56.388,36.703 r180 top value=33pF
C87 "2.2uF/10V" CAP_C_1608X80 43.815,43.18 r270 top value=33pF
C88 "4.7uF/16V" CAP_C_1608X80 42.418,43.18 r90 top value=33pF
C89 "4.7uF/16V" CAP_C_1608X80 49.74,22.618 r270 top value=33pF
C90 "0.1uF/16V" CAP_C_1608X80 56.388,34.671 r180 top value=33pF
C91 "0.1uF/16V" CAP_C_1608X80 56.388,33.274 r180 top value=33pF
C92 "4.7uF/16V" CAP_C_1608X80 34.906,25.338 r0 top value=33pF
C93 "1uF/16V" CAP_C_1608X80 34.925,29.662 r0 top value=33pF
C94 "0.1uF/16V" CAP_C_1608X80 34.925,28.265 r0 top value=33pF
C95 "1uF/16V" CAP_C_1608X80 34.925,42.276 r0 top value=33pF
C96 "0.1uF/16V" CAP_C_1608X80 34.925,40.879 r0 top value=33pF
C97 "0.1uF/16V" CAP_C_1608X80 86.188,36.068 r270 bottom value=33pF
C98 "0.1uF/16V" CAP_C_1608X80 37.169,22.618 r90 top value=33pF
C99 "0.1uF/16V" CAP_C_1608X80 40.031,72.263 r270 bottom value=33pF
C100 "0.1uF/16V" CAP_C_1608X80 39.963,22.618 r90 top value=33pF
C101 "0.1uF/16V" CAP_C_1608X80 13.888,45.466 r90 bottom value=33pF
C103 "0.1uF/16V" CAP_C_1608X80 42.757,22.618 r90 top value=33pF
D1 "SS54" DO-214AC_SMA 27.585,76.327 r0 top value=SS34
FB2 "BLM18PG121SN1D" IND_1608X65 34.917,26.802 r0 top
H1 "ESQ-126-14-G-D" SAMTEC_ESQ-126-14-G-D 11.19,13.88 r90 top locked
H2 "ESQ-126-14-G-D" SAMTEC_ESQ-126-14-G-D 6.11,13.88 r90 top locked
Hole1 "hole_space" HOLE_SPACE 89.3,5 r0 top locked
Hole2 "hole_space" HOLE_SPACE 89.3,85 r0 top locked
Hole3 "hole_space" HOLE_SPACE 3.57,8.8 r0 top
Hole4 "hole_space" HOLE_SPACE 3.57,82.46 r0 top locked
J1 "5040500591" 5040500591 88,69 r270 top locked
J1B "532610671" MOLEX_532610671 88.173,69 r270 bottom
J2 "5040500991" 5040500991 88,48 r270 top locked
J2B "0532610971" 0532610971 88.17,48 r270 bottom
J3 "5040500991" 5040500991 73,85 r0 top
J3B "0532610971" 0532610971 73,85.173 r0 bottom
J4 "5040500691" 5040500691 88,24 r270 top
J4B "532610671" MOLEX_532610671 88.173,24 r270 bottom
J5 "009159010061911" 009159010061911 68,4.186 r90 top
J5BK "61301021121" 61301021121 68.047,10.643 r180 top
J6 "GMCB05321121BEU" AMPHENOL_GMCB05321121BEU 46.5,3.582 r0 top locked
L1 "SRP7050TA-220M" SRP7050TA-220M 27.585,82.423 r180 top
LED1 "150060BS75000" LED_0603 27.643,4.445 r270 top value="LED 3 - 5 ly 2 Colour"
LED2 "150060GS75000" LED_0603 31.241,4.445 r270 top value="LED 3 - 5 ly 2 Colour"
LED3 "150060RS75000" LED_0603 20.447,4.445 r270 top value="LED 3 - 5 ly 2 Colour"
LED4 "150060RS75000" LED_0603 34.838,4.445 r270 top value="LED 3 - 5 ly 2 Colour"
LED5 "150060YS75000" LED_0603 24.045,4.445 r270 top value="LED 3 - 5 ly 2 Colour"
Q1 "MMBT2222A" SOT95P240X120-3N 56.668,80.391 r90 top
R1 "10k" RES_C_1608X60 68.326,46.863 r90 bottom
R2 "10k" RES_C_1608X60 69.868,46.863 r90 bottom
R3 "10k" RES_C_1608X60 71.41,46.863 r90 bottom
R4 "10k" RES_C_1608X60 72.952,46.863 r90 bottom
R5 "10k" RES_C_1608X60 74.495,46.863 r90 bottom
R6 "10k" RES_C_1608X60 76.037,46.863 r90 bottom
R7 "10k" RES_C_1608X60 77.579,46.863 r90 bottom
R8 "10k" RES_C_1608X60 79.121,46.863 r90 bottom
R9 "22R" RES_C_1608X60 67.437,46.85 r90 top
R10 "22R" RES_C_1608X60 69.233,46.85 r90 top
R11 "22R" RES_C_1608X60 71.029,46.85 r90 top
R12 "22R" RES_C_1608X60 72.825,46.85 r90 top
R13 "22R" RES_C_1608X60 74.622,46.85 r90 top
R14 "22R" RES_C_1608X60 76.418,46.85 r90 top
R15 "22R" RES_C_1608X60 78.214,46.85 r90 top
R16 "22R" RES_C_1608X60 80.01,46.85 r90 top
R17 "47k" RES_C_1608X60 76.49,50.433 r0 bottom
R18 "10k" RES_C_1608X60 56.388,39.497 r0 top
R19 "0R" RES_C_1608X60 70.993,50.433 r180 bottom
R20 "22R" RES_C_1608X60 56.388,40.917 r0 top
R21 "22R" RES_C_1608X60 56.388,42.291 r0 top
R22 "10k" RES_C_1608X60 56.388,43.688 r0 top
R23 "22R" RES_C_1608X60 32.131,24.765 r180 bottom
R24 "22R" RES_C_1608X60 35.687,49.276 r270 bottom
R25 "22R" RES_C_1608X60 32.131,26.162 r180 bottom
R26 "22R" RES_C_1608X60 34.29,49.276 r270 bottom
R27 "22R" RES_C_1608X60 32.131,28.956 r180 bottom
R28 "22R" RES_C_1608X60 37.084,49.276 r270 bottom
R29 "22R" RES_C_1608X60 32.131,35.941 r180 bottom
R30 "22R" RES_C_1608X60 38.481,49.276 r270 bottom
R31 "22R" RES_C_1608X60 32.131,34.544 r180 bottom
R32 "22R" RES_C_1608X60 39.878,49.276 r270 bottom
R33 "22R" RES_C_1608X60 32.131,30.353 r180 bottom
R34 "22R" RES_C_1608X60 41.275,49.276 r270 bottom
R35 "22R" RES_C_1608X60 32.131,37.338 r180 bottom
R36 "22R" RES_C_1608X60 44.069,49.276 r270 bottom
R37 "22R" RES_C_1608X60 32.131,38.735 r180 bottom
R38 "22R" RES_C_1608X60 42.672,49.276 r270 bottom
R39 "22R" RES_C_1608X60 32.131,40.132 r180 bottom
R40 "22R" RES_C_1608X60 45.466,49.276 r270 bottom
R41 "22R" RES_C_1608X60 32.131,41.529 r180 bottom
R42 "22R" RES_C_1608X60 46.863,49.276 r270 bottom
R43 "22R" RES_C_1608X60 32.131,42.926 r180 bottom
R44 "22R" RES_C_1608X60 48.26,49.276 r270 bottom
R45 "22R" RES_C_1608X60 32.131,44.323 r180 bottom
R46 "22R" RES_C_1608X60 61.595,45.72 r180 bottom
R47 "22R" RES_C_1608X60 56.642,49.276 r270 bottom
R48 "22R" RES_C_1608X60 45.212,43.18 r90 bottom
R49 "22R" RES_C_1608X60 55.245,49.276 r270 bottom
R50 "22R" RES_C_1608X60 43.815,43.18 r90 bottom
R51 "22R" RES_C_1608X60 61.595,44.323 r180 bottom
R52 "22R" RES_C_1608X60 61.595,35.941 r180 bottom
R53 "22R" RES_C_1608X60 32.131,31.75 r180 bottom
R54 "22R" RES_C_1608X60 42.418,43.18 r90 bottom
R55 "22R" RES_C_1608X60 61.595,42.926 r180 bottom
R56 "22R" RES_C_1608X60 32.131,27.559 r180 bottom
R57 "22R" RES_C_1608X60 61.595,41.529 r180 bottom
R58 "22R" RES_C_1608X60 32.151,33.147 r180 bottom
R59 "22R" RES_C_1608X60 61.595,38.735 r180 bottom
R60 "22R" RES_C_1608X60 32.133,23.364 r180 bottom
R61 "22R" RES_C_1608X60 59.436,49.276 r270 bottom
R62 "22R" RES_C_1608X60 46.609,43.18 r90 bottom
R63 "22R" RES_C_1608X60 61.595,33.147 r180 bottom
R64 "22R" RES_C_1608X60 61.595,34.544 r180 bottom
R65 "22R" RES_C_1608X60 39.624,43.18 r90 bottom
R66 "22R" RES_C_1608X60 61.595,37.338 r180 bottom
R67 "22R" RES_C_1608X60 41.021,43.18 r90 bottom
R68 "22R" RES_C_1608X60 61.595,40.132 r180 bottom
R69 "22R" RES_C_1608X60 32.131,47.117 r180 bottom
R70 "22R" RES_C_1608X60 53.848,49.276 r270 bottom
R71 "22R" RES_C_1608X60 32.131,45.72 r180 bottom
R72 "22R" RES_C_1608X60 52.451,49.276 r270 bottom
R73 "22R" RES_C_1608X60 61.595,31.75 r180 bottom
R74 "22R" RES_C_1608X60 61.595,30.353 r180 bottom
R75 "22R" RES_C_1608X60 51.054,49.276 r270 bottom
R76 "22R" RES_C_1608X60 49.657,49.276 r270 bottom
R77 "22R" RES_C_1608X60 58.039,49.276 r270 bottom
R78 "22R" RES_C_1608X60 61.595,47.117 r180 bottom
R79 "1k" RES_C_1608X60 27.63,7.746 r270 top
R80 "1k" RES_C_1608X60 31.228,7.746 r270 top
R81 "22R" RES_C_1608X60 51.147,22.618 r90 top
R82 "10k (DNP)" RES_C_1608X60 49.403,43.18 r270 top
R83 "10k" RES_C_1608X60 48.006,43.18 r90 top
R84 "10k" RES_C_1608X60 46.609,43.18 r270 top
R85 "22R" RES_C_1608X60 46.948,22.606 r90 top
R86 "10k (DNP)" RES_C_1608X60 45.212,43.18 r90 top
R87 "10k" RES_C_1608X60 78.32,9.667 r0 top
R88 "1k" RES_C_1608X60 57.811,75.946 r90 top
R89 "0R" RES_C_1608X60 82.169,47.625 r180 bottom
R90 "0R" RES_C_1608X60 82.169,46.101 r180 bottom
R91 "10k" RES_C_1608X60 55.652,75.946 r90 top
R92 "100R (DNP)" RES_C_1608X60 78.827,79.667 r0 bottom
R93 "100R (DNP)" RES_C_1608X60 70.699,79.667 r0 bottom
R94 "22R" RES_C_1608X60 15.86,23.154 r90 top
R95 "22R" RES_C_1608X60 17.257,23.154 r90 top
R96 "22R" RES_C_1608X60 17.257,37.378 r90 top
R97 "22R" RES_C_1608X60 18.654,23.154 r90 top
R98 "22R" RES_C_1608X60 18.654,37.378 r90 top
R99 "22R" RES_C_1608X60 20.064,37.378 r90 top
R100 "2.2k" RES_C_1608X60 34.826,7.746 r90 top
R114 "60R" RES_C_1608X60 19.08,14.417 r0 top
R115 "60R" RES_C_1608X60 19.08,15.941 r180 top
R116 "10k" RES_C_1608X60 19.067,12.893 r0 top
R117 "10k" RES_C_1608X60 49.048,75.946 r270 top
R118 "10k" RES_C_1608X60 51.207,75.946 r270 top
R119 "4.7k" RES_C_1608X60 20.435,7.746 r90 top
R121 "1k" RES_C_1608X60 24.032,7.746 r90 top
R123 "470k" RES_C_1608X60 46.886,84.201 r270 top
R124 "11k" RES_C_1608X60 46.889,75.946 r90 top
R125 "47k" RES_C_1608X60 44.73,75.946 r270 top
R126 "1k" RES_C_1608X60 51.198,84.201 r90 top
R127 "10k" RES_C_1608X60 42.444,80.137 r270 top
R128 "5.9k" RES_C_1608X60 42.444,75.946 r270 top
R142 "22R" RES_C_1608X60 15.272,17.465 r180 top
R143 "22R" RES_C_1608X60 15.272,12.893 r180 top
R148 "0R" RES_C_1608X60 82.169,49.149 r0 bottom
R150 "0R" RES_C_1608X60 82.169,50.673 r0 bottom
R151 "4.7k" RES_C_1608X60 15.736,45.868 r270 top
R152 "4.7k" RES_C_1608X60 17.145,57.679 r90 top
R153 "4.7k" RES_C_1608X60 19.939,45.868 r270 top
R154 "22R" RES_C_1608X60 17.145,45.868 r90 top
R155 "22R" RES_C_1608X60 18.542,57.679 r270 top
R156 "22R" RES_C_1608X60 19.939,57.679 r270 top
R157 "22R" RES_C_1608X60 18.542,45.868 r90 top
R158 "22R" RES_C_1608X60 55.787,15.314 r270 top
R159 "22R" RES_C_1608X60 55.787,24.077 r90 top
R160 "22R" RES_C_1608X60 57.311,24.077 r90 top
R161 "16.5K" RES_C_1608X60 58.835,24.077 r270 top
R162 "16.5K" RES_C_1608X60 58.835,15.314 r90 top
R163 "22R" RES_C_1608X60 38.566,22.618 r90 top
R164 "22R" RES_C_1608X60 41.354,22.618 r90 top
R165 "22R" RES_C_1608X60 44.154,22.618 r90 top
SB1 "JUMPER" JUMPER_1608 45.873,86.868 r0 top
SB2 "JUMPER" JUMPER_1608 59.089,19.759 r90 top
TP1 "Test Point" TESTPOINT 42.444,84.074 r180 top value=N/A
TP12 "Test Point" TESTPOINT 56.668,84.074 r90 top value=N/A
TP13 "Test Point" TESTPOINT 20.981,84.074 r90 top value=N/A
TVS2 "ESDCAN02-2BWY" SOT323-3L_STM 15.27,15.179 r90 top
U1 "STM32H745XIH6" BGA265C80P17X17_1400X1400X110N 45.669,32.739 r0 top locked
U2 "IS42S32400J-6BL" BGA90C80P9X15_800X1300X120 45.557,60.001 r90 top locked
U3 "MTFC32GAZAQDW-AAT" BGA_100_C_100P_10X17_1400X1800X150 73.715,59.181 r0 top
U4 "AS3004204-0108X0PSAY" SOIC127P790X216-8N 17.972,30.266 r90 top
U5 "SN65HVD230DR" SOIC127P599X175-8N 24.922,15.179 r180 top
U6 "DS90LV011AQ-Q1" DS90LV011AQ-Q1 78.827,77.127 r0 bottom
U7 "DS90LV011AQ-Q1" DS90LV011AQ-Q1 70.699,77.127 r0 bottom
U9 "TPS259470ARPWR" VQFN-HR-10 49.139,80.104 r90 top
U10 "TPS5430DDAR" CONV_TPS5430DDAR 37.857,78.217 r90 top
U14 "IS66WVS4M8BLL-104NLI" SOIC8_150MIL_N_ISI 17.818,51.71 r90 top
U15 "TPL5010DDCR" TPL5010DDCR 56.549,19.759 r90 top
U16 "TC1047AVNBTR" SOT-23_MC_MCH 37.282,72.352 r180 bottom
U17 "TC1047AVNBTR" SOT-23_MC_MCH 16.637,45.377 r0 bottom
U18 "TC1047AVNBTR" SOT-23_MC_MCH 83.439,36.157 r180 bottom
X1 "ECS-250-12-33Q-JES-TR" XTAL_ECS-250-12-33Q-JES-TR 34.671,32.583 r0 top value=4Mhz
X2 "XT1312HHRXX32K76E" XT1312HHRXX32K76E 34.91,37.995 r270 top

## Footprints (in the part's own frame and the unit in brackets; to place one, negate y for a bottom-side part, rotate by r counter-clockwise, add the part's x,y. Pads: shape width x height; smd on the part's side, far side on the other; paste and mask are expansions set on the pad)
0532610971 [mm] "CONN HEADER SMD R/A 9POS 1.25MM"
  rect 0.8x1.6 smd mask+0.076: 1(-5,2.4) 2(-3.75,2.4) 3(-2.5,2.4) 4(-1.25,2.4) 5(0,2.4) 6(1.25,2.4) 7(2.5,2.4) 8(3.75,2.4) 9(5,2.4)
  rect 2.1x3 smd mask+0.076: S1(-7.55,-0.5) S2(7.55,-0.5)
  silkscreen extent -8.2,-2.6 8.2,4.07, body extent -8.2,-2.67 8.2,2.53, height 3.2
5040500591 [mil]
  rect 26x41 smd: 1(118.11,-119.76) 2(59.06,-119.76) 3(0,-119.76) 4(-59.06,-119.76) 5(-118.11,-119.76)
  rect 51x73 smd: 6(-208.86,84.57) 6(208.86,84.57)
  silkscreen extent -226,-173 227,125, body extent -237,-134 237,120, height 79
5040500691 [mil]
  rect 26x41 smd paste+0 mask+0: 1(147.64,-119.76) 2(88.58,-119.76) 3(29.53,-119.76) 4(-29.53,-119.76) 5(-88.58,-119.76) 6(-147.64,-119.76)
  rect 51x73 smd paste-36.5 mask-36.5: 7(-238.19,84.57) 8(238.19,84.57)
  silkscreen extent -256,-173 256,125, body extent -267,-128 267,126, height 79
5040500991 [mil]
  rect 26x41 smd: 1(236.22,-119.76) 2(177.17,-119.76) 3(118.11,-119.76) 4(59.06,-119.76) 5(0,-119.76) 6(-59.06,-119.76) 7(-118.11,-119.76) 8(-177.17,-119.76) 9(-236.22,-119.76)
  rect 51x73 smd: 10(-326.97,84.57) 10(326.97,84.57)
  silkscreen extent -344,-173 344,126, body extent -354,-129 357,124, height 79
61301021121 [mm] "Pin Header, pitch 2.54 mm, THT, Vertical, dual row, 10p"
  rrect50% 1.65x1.65 hole 1.1: 1(-5.08,-1.27)
  round 1.65 hole 1.1: 2(-5.08,1.27) 3(-2.54,-1.27) 4(-2.54,1.27) 5(0,-1.27) 6(0,1.27) 7(2.54,-1.27) 8(2.54,1.27) 9(5.08,-1.27) 10(5.08,1.27)
  silkscreen extent -7.08,-2.62 6.5,2.62, body extent -6.35,-2.54 6.35,2.54, height 8.59
009159010061911 [mm]
  rect 4x1 smd paste-2539.97: 1(0,4) 2(0,2) 3(0,0) 4(0,-2) 5(0,-4)
  rect 4x1 smd far side paste-2539.97: 6(0,4) 7(0,2) 8(0,0) 9(0,-2) 10(0,-4)
  Keep-Out Layer lines w0.1: -2.386,1.3 0.2,1.3 cw(c0.2,1) 0.2,0.7 -2.386,0.7
  silkscreen extent -2.39,-4.7 3.16,4.7
AMPHENOL_GMCB05321121BEU [mm]
  rect 0.4x1.35 smd: 1(1.3,2.675) 2(0.65,2.675) 3(0,2.675) 4(-0.65,2.675) 5(-1.3,2.675)
  rect 1.45x1.3 smd: SH1(-3.425,0) SH2(3.425,0)
  rect 1.6x1.4 smd: SH3(-3.2,2.45) SH6(3.2,2.45)
  rect 1.9x1.9 smd: SH4(-1.2,0) SH5(1.2,0)
  silkscreen extent -3.75,-1.45 3.75,4, body extent -3.99,-2.57 3.99,2.87, height 2.71
BGA90C80P9X15_800X1300X120 [mm]
  round 0.41 smd: A1(-3.2,5.6) A2(-2.4,5.6) A3(-1.6,5.6) A7(1.6,5.6) A8(2.4,5.6) A9(3.2,5.6) B1(-3.2,4.8) B2(-2.4,4.8) B3(-1.6,4.8) B7(1.6,4.8) B8(2.4,4.8) B9(3.2,4.8) C1(-3.2,4) C2(-2.4,4) C3(-1.6,4) C7(1.6,4) C8(2.4,4) C9(3.2,4) D1(-3.2,3.2) D2(-2.4,3.2) D3(-1.6,3.2) D7(1.6,3.2) D8(2.4,3.2) D9(3.2,3.2) E1(-3.2,2.4) E2(-2.4,2.4) E3(-1.6,2.4) E7(1.6,2.4) E8(2.4,2.4) E9(3.2,2.4) F1(-3.2,1.6) F2(-2.4,1.6) F3(-1.6,1.6) F7(1.6,1.6) F8(2.4,1.6) F9(3.2,1.6) G1(-3.2,0.8) G2(-2.4,0.8) G3(-1.6,0.8) G7(1.6,0.8) G8(2.4,0.8) G9(3.2,0.8) H1(-3.2,0) H2(-2.4,0) H3(-1.6,0) H7(1.6,0) H8(2.4,0) H9(3.2,0) J1(-3.2,-0.8) J2(-2.4,-0.8) J3(-1.6,-0.8) J7(1.6,-0.8) J8(2.4,-0.8) J9(3.2,-0.8) K1(-3.2,-1.6) K2(-2.4,-1.6) K3(-1.6,-1.6) K7(1.6,-1.6) K8(2.4,-1.6) K9(3.2,-1.6) L1(-3.2,-2.4) L2(-2.4,-2.4) L3(-1.6,-2.4) L7(1.6,-2.4) L8(2.4,-2.4) L9(3.2,-2.4) M1(-3.2,-3.2) M2(-2.4,-3.2) M3(-1.6,-3.2) M7(1.6,-3.2) M8(2.4,-3.2) M9(3.2,-3.2) N1(-3.2,-4) N2(-2.4,-4) N3(-1.6,-4) N7(1.6,-4) N8(2.4,-4) N9(3.2,-4) P1(-3.2,-4.8) P2(-2.4,-4.8) P3(-1.6,-4.8) P7(1.6,-4.8) P8(2.4,-4.8) P9(3.2,-4.8) R1(-3.2,-5.6) R2(-2.4,-5.6) R3(-1.6,-5.6) R7(1.6,-5.6) R8(2.4,-5.6) R9(3.2,-5.6)
  silkscreen extent -4.1,-6.5 4,6.6, body extent -4,-6.5 4,6.5, height 1.2
BGA265C80P17X17_1400X1400X110N [mm]
  round 0.37 smd: A1(-6.4,6.4) A2(-5.6,6.4) A3(-4.8,6.4) A4(-4,6.4) A5(-3.2,6.4) A6(-2.4,6.4) A7(-1.6,6.4) A8(-0.8,6.4) A9(0,6.4) A10(0.8,6.4) A11(1.6,6.4) A12(2.4,6.4) A13(3.2,6.4) A14(4,6.4) A15(4.8,6.4) A16(5.6,6.4) A17(6.4,6.4) B1(-6.4,5.6) B2(-5.6,5.6) B3(-4.8,5.6) B4(-4,5.6) B5(-3.2,5.6) B6(-2.4,5.6) B7(-1.6,5.6) B8(-0.8,5.6) B9(0,5.6) B10(0.8,5.6) B11(1.6,5.6) B12(2.4,5.6) B13(3.2,5.6) B14(4,5.6) B15(4.8,5.6) B16(5.6,5.6) B17(6.4,5.6) C1(-6.4,4.8) C2(-5.6,4.8) C3(-4.8,4.8) C4(-4,4.8) C5(-3.2,4.8) C6(-2.4,4.8) C7(-1.6,4.8) C8(-0.8,4.8) C9(0,4.8) C10(0.8,4.8) C11(1.6,4.8) C12(2.4,4.8) C13(3.2,4.8) C14(4,4.8) C15(4.8,4.8) C16(5.6,4.8) C17(6.4,4.8) D1(-6.4,4) D2(-5.6,4) D3(-4.8,4) D4(-4,4) D5(-3.2,4) D6(-2.4,4) D7(-1.6,4) D8(-0.8,4) D9(0,4) D10(0.8,4) D11(1.6,4) D12(2.4,4) D13(3.2,4) D14(4,4) D15(4.8,4) D16(5.6,4) D17(6.4,4) E1(-6.4,3.2) E2(-5.6,3.2) E3(-4.8,3.2) E4(-4,3.2) E5(-3.2,3.2) E6(-2.4,3.2) E7(-1.6,3.2) E8(-0.8,3.2) E9(0,3.2) E10(0.8,3.2) E11(1.6,3.2) E12(2.4,3.2) E13(3.2,3.2) E14(4,3.2) E15(4.8,3.2) E16(5.6,3.2) E17(6.4,3.2) F1(-6.4,2.4) F2(-5.6,2.4) F3(-4.8,2.4) F4(-4,2.4) F5(-3.2,2.4) F13(3.2,2.4) F14(4,2.4) F15(4.8,2.4) F16(5.6,2.4) F17(6.4,2.4) G1(-6.4,1.6) G2(-5.6,1.6) G3(-4.8,1.6) G4(-4,1.6) G5(-3.2,1.6) G7(-1.6,1.6) G8(-0.8,1.6) G9(0,1.6) G10(0.8,1.6) G11(1.6,1.6) G13(3.2,1.6) G14(4,1.6) G15(4.8,1.6) G16(5.6,1.6) G17(6.4,1.6) H1(-6.4,0.8) H2(-5.6,0.8) H3(-4.8,0.8) H4(-4,0.8) H5(-3.2,0.8) H7(-1.6,0.8) H8(-0.8,0.8) H9(0,0.8) H10(0.8,0.8) H11(1.6,0.8) H13(3.2,0.8) H14(4,0.8) H15(4.8,0.8) H16(5.6,0.8) H17(6.4,0.8) J1(-6.4,0) J2(-5.6,0) J3(-4.8,0) J4(-4,0) J5(-3.2,0) J7(-1.6,0) J8(-0.8,0) J9(0,0) J10(0.8,0) J11(1.6,0) J13(3.2,0) J14(4,0) J15(4.8,0) J16(5.6,0) J17(6.4,0) K1(-6.4,-0.8) K2(-5.6,-0.8) K3(-4.8,-0.8) K4(-4,-0.8) K5(-3.2,-0.8) K7(-1.6,-0.8) K8(-0.8,-0.8) K9(0,-0.8) K10(0.8,-0.8) K11(1.6,-0.8) K13(3.2,-0.8) K14(4,-0.8) K15(4.8,-0.8) K16(5.6,-0.8) K17(6.4,-0.8) L1(-6.4,-1.6) L2(-5.6,-1.6) L3(-4.8,-1.6) L4(-4,-1.6) L5(-3.2,-1.6) L7(-1.6,-1.6) L8(-0.8,-1.6) L9(0,-1.6) L10(0.8,-1.6) L11(1.6,-1.6) L13(3.2,-1.6) L14(4,-1.6) L15(4.8,-1.6) L16(5.6,-1.6) L17(6.4,-1.6) M1(-6.4,-2.4) M2(-5.6,-2.4) M3(-4.8,-2.4) M4(-4,-2.4) M5(-3.2,-2.4) M13(3.2,-2.4) M14(4,-2.4) M15(4.8,-2.4) M16(5.6,-2.4) M17(6.4,-2.4) N1(-6.4,-3.2) N2(-5.6,-3.2) N3(-4.8,-3.2) N4(-4,-3.2) N5(-3.2,-3.2) N6(-2.4,-3.2) N7(-1.6,-3.2) N8(-0.8,-3.2) N9(0,-3.2) N10(0.8,-3.2) N11(1.6,-3.2) N12(2.4,-3.2) N13(3.2,-3.2) N14(4,-3.2) N15(4.8,-3.2) N16(5.6,-3.2) N17(6.4,-3.2) P1(-6.4,-4) P2(-5.6,-4) P3(-4.8,-4) P4(-4,-4) P5(-3.2,-4) P6(-2.4,-4) P7(-1.6,-4) P8(-0.8,-4) P9(0,-4) P10(0.8,-4) P11(1.6,-4) P12(2.4,-4) P13(3.2,-4) P14(4,-4) P15(4.8,-4) P16(5.6,-4) P17(6.4,-4) R1(-6.4,-4.8) R2(-5.6,-4.8) R3(-4.8,-4.8) R4(-4,-4.8) R5(-3.2,-4.8) R6(-2.4,-4.8) R7(-1.6,-4.8) R8(-0.8,-4.8) R9(0,-4.8) R10(0.8,-4.8) R11(1.6,-4.8) R12(2.4,-4.8) R13(3.2,-4.8) R14(4,-4.8) R15(4.8,-4.8) R16(5.6,-4.8) R17(6.4,-4.8) T1(-6.4,-5.6) T2(-5.6,-5.6) T3(-4.8,-5.6) T4(-4,-5.6) T5(-3.2,-5.6) T6(-2.4,-5.6) T7(-1.6,-5.6) T8(-0.8,-5.6) T9(0,-5.6) T10(0.8,-5.6) T11(1.6,-5.6) T12(2.4,-5.6) T13(3.2,-5.6) T14(4,-5.6) T15(4.8,-5.6) T16(5.6,-5.6) T17(6.4,-5.6) U1(-6.4,-6.4) U2(-5.6,-6.4) U3(-4.8,-6.4) U4(-4,-6.4) U5(-3.2,-6.4) U6(-2.4,-6.4) U7(-1.6,-6.4) U8(-0.8,-6.4) U9(0,-6.4) U10(0.8,-6.4) U11(1.6,-6.4) U12(2.4,-6.4) U13(3.2,-6.4) U14(4,-6.4) U15(4.8,-6.4) U16(5.6,-6.4) U17(6.4,-6.4)
  silkscreen extent -7.67,-7 7,7, body extent -7,-7 7,7, height 1.1
BGA_100_C_100P_10X17_1400X1800X150 [mm] "BGA, 100-Leads, Body 14.00x18.00mmx1.50mm, Pitch 1.00mm"
  round 0.49 smd: A1(-4.5,8) A2(-3.5,8) A9(3.5,8) A10(4.5,8) B1(-4.5,7) B10(4.5,7) D2(-3.5,5) D3(-2.5,5) D4(-1.5,5) D5(-0.5,5) D6(0.5,5) D7(1.5,5) D8(2.5,5) D9(3.5,5) E2(-3.5,4) E3(-2.5,4) E4(-1.5,4) E5(-0.5,4) E6(0.5,4) E7(1.5,4) E8(2.5,4) E9(3.5,4) F2(-3.5,3) F3(-2.5,3) F4(-1.5,3) F5(-0.5,3) F6(0.5,3) F7(1.5,3) F8(2.5,3) F9(3.5,3) G2(-3.5,2) G3(-2.5,2) G4(-1.5,2) G5(-0.5,2) G6(0.5,2) G7(1.5,2) G8(2.5,2) G9(3.5,2) H2(-3.5,1) H3(-2.5,1) H4(-1.5,1) H5(-0.5,1) H6(0.5,1) H7(1.5,1) H8(2.5,1) H9(3.5,1) J2(-3.5,0) J3(-2.5,0) J4(-1.5,0) J5(-0.5,0) J6(0.5,0) J7(1.5,0) J8(2.5,0) J9(3.5,0) K2(-3.5,-1) K3(-2.5,-1) K4(-1.5,-1) K5(-0.5,-1) K6(0.5,-1) K7(1.5,-1) K8(2.5,-1) K9(3.5,-1) L2(-3.5,-2) L3(-2.5,-2) L4(-1.5,-2) L5(-0.5,-2) L6(0.5,-2) L7(1.5,-2) L8(2.5,-2) L9(3.5,-2) M2(-3.5,-3) M3(-2.5,-3) M4(-1.5,-3) M5(-0.5,-3) M6(0.5,-3) M7(1.5,-3) M8(2.5,-3) M9(3.5,-3) N2(-3.5,-4) N3(-2.5,-4) N4(-1.5,-4) N5(-0.5,-4) N6(0.5,-4) N7(1.5,-4) N8(2.5,-4) N9(3.5,-4) P2(-3.5,-5) P3(-2.5,-5) P4(-1.5,-5) P5(-0.5,-5) P6(0.5,-5) P7(1.5,-5) P8(2.5,-5) P9(3.5,-5) T1(-4.5,-7) T10(4.5,-7) U1(-4.5,-8) U2(-3.5,-8) U9(3.5,-8) U10(4.5,-8)
  round 0.35 on Mech8 paste+0 mask+0: A1(-4.5,8) A2(-3.5,8) A9(3.5,8) A10(4.5,8) B1(-4.5,7) B10(4.5,7) D2(-3.5,5) D3(-2.5,5) D4(-1.5,5) D5(-0.5,5) D6(0.5,5) D7(1.5,5) D8(2.5,5) D9(3.5,5) E2(-3.5,4) E3(-2.5,4) E4(-1.5,4) E5(-0.5,4) E6(0.5,4) E7(1.5,4) E8(2.5,4) E9(3.5,4) F2(-3.5,3) F3(-2.5,3) F4(-1.5,3) F5(-0.5,3) F6(0.5,3) F7(1.5,3) F8(2.5,3) F9(3.5,3) G2(-3.5,2) G3(-2.5,2) G4(-1.5,2) G5(-0.5,2) G6(0.5,2) G7(1.5,2) G8(2.5,2) G9(3.5,2) H2(-3.5,1) H3(-2.5,1) H4(-1.5,1) H5(-0.5,1) H6(0.5,1) H7(1.5,1) H8(2.5,1) H9(3.5,1) J2(-3.5,0) J3(-2.5,0) J4(-1.5,0) J5(-0.5,0) J6(0.5,0) J7(1.5,0) J8(2.5,0) J9(3.5,0) K2(-3.5,-1) K3(-2.5,-1) K4(-1.5,-1) K5(-0.5,-1) K6(0.5,-1) K7(1.5,-1) K8(2.5,-1) K9(3.5,-1) L2(-3.5,-2) L3(-2.5,-2) L4(-1.5,-2) L5(-0.5,-2) L6(0.5,-2) L7(1.5,-2) L8(2.5,-2) L9(3.5,-2) M2(-3.5,-3) M3(-2.5,-3) M4(-1.5,-3) M5(-0.5,-3) M6(0.5,-3) M7(1.5,-3) M8(2.5,-3) M9(3.5,-3) N2(-3.5,-4) N3(-2.5,-4) N4(-1.5,-4) N5(-0.5,-4) N6(0.5,-4) N7(1.5,-4) N8(2.5,-4) N9(3.5,-4) P2(-3.5,-5) P3(-2.5,-5) P4(-1.5,-5) P5(-0.5,-5) P6(0.5,-5) P7(1.5,-5) P8(2.5,-5) P9(3.5,-5) T1(-4.5,-7) T10(4.5,-7) U1(-4.5,-8) U2(-3.5,-8) U9(3.5,-8) U10(4.5,-8)
  silkscreen extent -7.77,-9 7,9, body extent -7,-9 7,9, height 1.5
CAP_C_1608X80 [mm] "Chip Capacitor, 2-Leads, Body 1.60x0.80mm, IPC Medium Density"
  rrect50% 0.85x0.95 smd: 1(-0.775,0) 2(0.775,0)
  silkscreen extent -0.9,-0.7 0.9,0.7, body extent -0.87,-0.48 0.87,0.48, height 0.85
CONV_TPS5430DDAR [mm] "IC REG BUCK ADJ 3A 8SOPWR"
  rrect10% 1.55x0.6 smd mask+0: 1(-2.7,1.905) 2(-2.7,0.635) 3(-2.7,-0.635) 4(-2.7,-1.905) 5(2.7,-1.905) 6(2.7,-0.635) 7(2.7,0.635) 8(2.7,1.905)
  round 0.3 hole 0.2 mask+0: 6(-0.65,1.95) 6(-0.65,-0.65) 6(-0.65,0.65) 6(-0.65,-1.95) 6(0.65,1.95) 6(0.65,-0.65) 6(0.65,0.65) 6(0.65,-1.95)
  rect 2.95x4.9 smd paste+0: 9(0,0)
  silkscreen extent -4.17,-2.69 1.96,2.72, body extent -3,-2.45 3,2.45, height 1.7
DO-214AC_SMA [mm] "Molded Diode, 2-Leads, Body 5.20x2.61mm, IPC Medium Density"
  rrect30% 2.55x1.65 smd: 1(-2.05,0) 2(2.05,0)
  silkscreen extent -3.6,-1.5 2.8,1.5, body extent -2.6,-1.3 2.6,1.3, height 2.4
DS90LV011AQ-Q1 [mm]
  rrect50% 1.21x0.59 smd: 1(-1.255,0.95) 2(-1.255,0) 3(-1.255,-0.95) 4(1.255,-0.95) 5(1.255,0.95)
  silkscreen extent -1.45,-1.45 0.8,1.88, body extent -1.4,-1.45 1.4,1.45, height 1.45
HOLE_SPACE [mm]
  round 1 hole 0.5: 1(-2.325,0) 1(-1.644,-1.644) 1(-1.644,1.644) 1(0,-2.286) 1(0,2.325) 1(1.644,-1.644) 1(1.644,1.644) 1(2.325,0)
  round 6 hole 3.3: 1(0,0)
IND_1608X65 [mm]
  rrect50% 0.85x0.95 smd: 1(-0.775,-0.008) 2(0.775,-0.008)
  silkscreen extent -0.91,-0.76 0.89,0.76, body extent -0.81,-0.48 0.79,0.47, height 0.8
JUMPER_1608 [mil]
  round 1 smd: 1(30.51,0)
  round 1 smd paste-99999 mask+4: 2(-30,0)
  Top Layer region: 38.88,-18.7 13.56,-18.7 -5,0 13.56,18.7 38.88,18.7 42.08,18.06 44.79,16.25 46.61,13.54 47.24,10.33 47.24,10.33 47.24,-10.33 46.61,-13.54 44.79,-16.25 42.08,-18.06 38.88,-18.7
  Top Layer region: -14.86,-0.09 3.75,-18.7 -38.37,-18.7 -41.57,-18.06 -44.28,-16.25 -46.1,-13.54 -46.73,-10.33 -46.73,-10.33 -46.73,10.33 -46.1,13.54 -44.28,16.25 -41.57,18.06 -38.37,18.7 -38.37,18.7 3.93,18.7
  silkscreen extent -40,-27 41,27
LED_0603 [mm]
  rrect50% 0.85x0.95 smd: 1(-0.775,0) 2(0.775,0)
  silkscreen extent -0.9,-0.7 1.4,0.7, body extent -0.8,-0.4 0.8,0.4, height 0.7
MOLEX_532610671 [mm]
  rect 0.8x1.6 smd: 1(-3.125,2.4) 2(-1.875,2.4) 3(-0.625,2.4) 4(0.625,2.4) 5(1.875,2.4) 6(3.125,2.4)
  rect 2.1x3 smd: S1(-5.675,-0.5) S2(5.675,-0.5)
  silkscreen extent -6.32,-2.6 6.32,4.6, body extent -6.32,-2.6 6.32,2.6, height 3.43
RES_C_1608X60 [mm] "Chip Resistor, 2-Leads, Body 1.63x0.83mm, IPC High Density"
  rrect50% 0.85x0.95 smd: 1(-0.775,0) 2(0.775,0)
  silkscreen extent -0.9,-0.7 0.9,0.7, body extent -0.87,-0.48 0.87,0.48, height 0.6
SAMTEC_ESQ-126-14-G-D [mm]
  rect 1.53x1.53 hole 0.9: 01(0,0)
  round 1.53 hole 0.9: 02(0,2.54) 03(2.54,0) 04(2.54,2.54) 05(5.08,0) 06(5.08,2.54) 07(7.62,0) 08(7.62,2.54) 09(10.16,0) 10(10.16,2.54) 11(12.7,0) 12(12.7,2.54) 13(15.24,0) 14(15.24,2.54) 15(17.78,0) 16(17.78,2.54) 17(20.32,0) 18(20.32,2.54) 19(22.86,0) 20(22.86,2.54) 21(25.4,0) 22(25.4,2.54) 23(27.94,0) 24(27.94,2.54) 25(30.48,0) 26(30.48,2.54) 27(33.02,0) 28(33.02,2.54) 29(35.56,0) 30(35.56,2.54) 31(38.1,0) 32(38.1,2.54) 33(40.64,0) 34(40.64,2.54) 35(43.18,0) 36(43.18,2.54) 37(45.72,0) 38(45.72,2.54) 39(48.26,0) 40(48.26,2.54) 41(50.8,0) 42(50.8,2.54) 43(53.34,0) 44(53.34,2.54) 45(55.88,0) 46(55.88,2.54) 47(58.42,0) 48(58.42,2.54) 49(60.96,0) 50(60.96,2.54) 51(63.5,0) 52(63.5,2.54)
  silkscreen extent -2.27,-1.2 65.03,3.74, body extent -1.52,-1.27 65.02,3.81, height 11.1
SOIC8_150MIL_N_ISI [mil]
  rect 57.5x22 smd paste+0 mask+0: 1(-107.25,75) 2(-107.25,25) 3(-107.25,-25) 4(-107.25,-75) 5(107.25,-75) 6(107.25,-25) 7(107.25,25) 8(107.25,75)
  silkscreen extent -168,-104 84,104, body extent -122,-99 122,99, height 69
SOIC127P599X175-8N [mm] "SN65HVD230DR"
  rrect25% 1.97x0.6 smd: 1(-2.47,1.905) 2(-2.47,0.635) 3(-2.47,-0.635) 4(-2.47,-1.905) 5(2.47,-1.905) 6(2.47,-0.635) 7(2.47,0.635) 8(2.47,1.905)
  silkscreen extent -4.14,-2.52 1.95,2.52, body extent -3,-2.45 3,2.45, height 1.75
SOIC127P790X216-8N [mm]
  rect 1.65x0.7 smd: 1(-3.6,1.905) 2(-3.6,0.635) 3(-3.6,-0.635) 4(-3.6,-1.905) 5(3.6,-1.905) 6(3.6,-0.635) 7(3.6,0.635) 8(3.6,1.905)
  silkscreen extent -4.27,-2.62 2.42,2.62, body extent -3.95,-2.62 3.95,2.62, height 2.16
SOT95P240X120-3N [mm]
  rrect25% 1.32x0.6 smd: 1(-1,0.95) 2(-1,-0.95) 3(1,0)
  silkscreen extent -1.6,-1.5 0.7,1.5, body extent -1.3,-1.52 1.3,1.52, height 1.2
SOT323-3L_STM [mil]
  rect 18x40 smd paste+0 mask+0: 1(-25.59,-41) 2(25.59,-41) 3(0,41)
  silkscreen extent -48,-87 48,32, body extent -44,-47 44,47, height 43
SOT-23_MC_MCH [mil]
  rect 24x52 smd paste+0 mask+0: 1(-37.4,-39.97) 2(37.4,-39.97) 3(0,39.97)
  silkscreen extent -65,-94 65,33, body extent -60,-52 60,52, height 44
SRP7050TA-220M [mm]
  rect 2.95x3.5 smd: 1(-2.725,0) 2(2.725,0)
  silkscreen extent -4.4,-3.3 4.4,3.3, body extent -3.65,-3.3 3.65,3.3, height 4.6
SW2-SMD [mm]
  rect 1.2x0.8 smd: 1(-3.5,0) 2(3.5,0)
  silkscreen extent -2.82,-1.85 2.82,1.85, body extent -3.05,-1.85 3.05,1.85, height 2.5
TESTPOINT [mm]
  round 1.5 smd: 1(0,0)
  silkscreen extent -1,-1 1,1
TPL5010DDCR [mm]
  rrect25% 1.45x0.59 smd: 1(-1.155,0.95) 2(-1.155,0) 3(-1.155,-0.95) 4(1.155,-0.95) 5(1.155,0) 6(1.155,0.95)
  silkscreen extent -2.5,-1.57 0.8,1.57, body extent -1.4,-1.45 1.4,1.45, height 1.1
VQFN-HR-10 [mm]
  rect 0.65x0.3 smd: 1(-0.938,0.692) 4(-0.941,-0.708) 7(0.909,-0.708) 10(0.909,0.692)
  rect 0.25x0.65 smd: 1(-0.738,0.867) 4(-0.741,-0.883) 7(0.709,-0.883) 10(0.709,0.867)
  rect 0.65x0.25 smd: 2(-0.938,0.216) 3(-0.941,-0.233) 8(0.909,-0.233) 9(0.909,0.216)
  rect 0.3x2.4 smd: 5(-0.265,-0.008) 6(0.235,-0.007)
  silkscreen extent -1.3,-1.25 1.28,1.23, body extent -1.03,-1.01 0.97,0.99, height 1
XT1312HHRXX32K76E [mm]
  rect 1x1.8 smd: 1(-1.25,0) 2(1.25,0)
  silkscreen extent -2.3,-0.75 0.4,0.75, body extent -1.6,-0.72 1.6,0.78, height 0.81
XTAL_ECS-250-12-33Q-JES-TR [mm]
  rect 1.3x1.1 smd: 1(-1.15,-0.9) 2(1.15,-0.9) 3(1.15,0.9) 4(-1.15,0.9)
  silkscreen extent -1.24,-2.08 0.3,1.25, body extent -1.6,-1.25 1.6,1.25, height 0.8

## Part data
BT1: library part BT2, "Switch button 2 pin"
C1 C2 C3 C4 C5 C6 C7 C8 C9 C10 C11 C12 C13 C14 C15 C16 C17 C18 C19 C20 C21 C22 C23 C24 C25 C26 C27 C28 C29 C30 C31 C32 C33 C34 C35 C36 C37 C38 C39 C40 C41 C44 C45 C46 C47 C48 C49 C50 C58 C59 C60 C61 C62 C63 C64 C65 C66 C67 C68 C69 C70 C71 C72 C73 C74 C75 C76 C77 C78 C79 C80 C86 C87 C88 C89 C90 C91 C92 C93 C94 C95 C96 C97 C98 C99 C100 C101 C103: library part CAP_SMD, "CAP_Chip"
C42 C43: library part _CAP_C_2, "CAP CHIP"
D1: "DIODE SCHOTTKY 40V 5A SMA", MPN=SS34, Solder=SMT
FB2: library part FB, "FERRITE BEAD"
H1 H2: Package=None, Availability=Unavailable, MF=Samtec, MP=ESQ-126-14-G-D, Price=None
J1: "1.50mm Pitch, Pico-Lock PCB Header, Single Row, Right-Angle, Surface Mount, Gold (Au) Plating, Positive Lock, 5 Circuits, Tape and Reel", Manufacturer_Name="Molex Connector Corporation", Copyright="Copyright (C) 2025 Ultra Librarian. All rights reserved.", Manufacturer_Part_Number=5040500591, RefDes=RefDes, Type=Type
J1B J4B: library part CONN_SMD_06, Package=None, Availability=Unavailable, MP=532610671, Price=None
J2 J3: "Connector Header Surface Mount, Right Angle 9 position 0.059\" (1.50mm)"
J2B J3B: library part CONN_SMD_09, "CONN HEADER SMD R/A 9POS 1.25MM"
J4: "1.50mm Pitch, Pico-Lock PCB Header, Single Row, Right-Angle, Surface Mount, Gold (Au) Plating, Positive Lock, 6 Circuits, Tape and Reel", Manufacturer_Name="Molex Connector Corporation", Copyright="Copyright (C) 2025 Ultra Librarian. All rights reserved.", Datasheet=https://www.molex.com/en-us/products/part-detail-pdf/5040500691?display=pdf, Manufacturer_Part_Number=5040500691, RefDes=RefDes, Type=Type
J5: "pads for STLink V3 minie"
J5BK: "WR-PHD Pin Header, THT, Vertical, pitch 2.54mm, 2 Row, 10P", Contact Resistance=20mOhm, Manufacturer="Wurth Elektronik", Operating Temperature Max=105°C, Operating Temperature Min=-40°C, Rated Current=3A, Withstanding Voltage=500V, Working Voltage=250V, Category="Board-to-Board Connectors", ComponentLink1Description="Website Link", ComponentLink1URL=https://www.we-online.com/redexpert/article/61301021121?ad, ComponentLink2Description="Datasheet Link", ComponentLink2URL=https://www.we-online.com/redexpert/spec/61301021121?ad, Gender="Pin Header", Manufacturer Part Number=61301021121, Match Code=WR-PHD, Mount="Through Hole", Number of Pins=10, Number Of Rows=2, Orientation=Vertical, Packaging=Bag, Pitch=2.54mm
J6: "Micro USB 2.0 Type B Receptacle Right Angle SMT, Tape and Reel Packaging", Package=None, Check_prices=https://www.snapeda.com/parts/GMCB05321121BEU/Amphenol/view-part/?ref=eda, MF="Amphenol Commercial Products", MP=GMCB05321121BEU, SnapEDA_Link=https://www.snapeda.com/parts/GMCB05321121BEU/Amphenol/view-part/?ref=snap
L1: library part _IND, "FIXED IND 22UH 2.5A 170 MOHM SMD"
LED1 LED2 LED3 LED4 LED5: library part "LED SMD"
Q1: "BJT, SOT-23, 40V, 600mA, NPN, 0.25W, 150Â°C", Package="SOT-23 Diotec", Check_prices=https://www.snapeda.com/parts/MMBT2222A/Diotec/view-part/?ref=eda, MF="Diotec Semiconductor", MP=MMBT2222A, SnapEDA_Link=https://www.snapeda.com/parts/MMBT2222A/Diotec/view-part/?ref=snap
R1 R2 R3 R4 R5 R6 R7 R8 R9 R10 R11 R12 R13 R14 R15 R16 R17 R18 R19 R20 R21 R22 R23 R24 R25 R26 R27 R28 R29 R30 R31 R32 R33 R34 R35 R36 R37 R38 R39 R40 R41 R42 R43 R44 R45 R46 R47 R48 R49 R50 R51 R52 R53 R54 R55 R56 R57 R58 R59 R60 R61 R62 R63 R64 R65 R66 R67 R68 R69 R70 R71 R72 R73 R74 R75 R76 R77 R78 R79 R80 R81 R82 R83 R84 R85 R86 R87 R88 R89 R90 R91 R92 R93 R94 R95 R96 R97 R98 R99 R100 R114 R115 R116 R117 R118 R119 R121 R123 R124 R125 R126 R127 R128 R142 R143 R148 R150 R151 R152 R153 R154 R155 R156 R157 R158 R159 R160 R161 R162 R163 R164 R165: library part _RES_B_2, "RES"
TP1 TP12 TP13: library part MCD-00630, "Test Point 0.3mm", Manufacturer=N/A, Manufacturer_HQ_COO=Unknown, Component_Country_Of_Origin=Unknown, ComponentLink1URL=http://tunmcdsvn.tun.st.com/Component_Documentation_Library/Trunk, ECCN_EU=n/a, ECCN_US=n/a, ID=3115, Initial_Board_Reference=MB1264, Internal_Part_Number=MCD-00630, Manufacturer_Part_Number=N/A, Order_Code_Digikey=N/A, Order_Code_Farnell=N/A, Order_Code_RS=N/A, Part_Preference=Recommended, Part_Type=Misc, Provided_By=n/a, ShowFields=YES, Status=Released
TVS2: "Automotive dual-line TVS in SOT323-3L for CAN bus (12 V system)", Manufacturer_Name=STMicroelectronics, Copyright="Copyright (C) 2025 Ultra Librarian. All rights reserved.", Manufacturer_Part_Number=ESDCAN02-2BWY, RefDes=RefDes, Type=Type
U1: "High-performance and DSP with DP-FPU, Arm Cortex-M7 + Cortex-M4 MCU with 2MBytes of Flash memory, 1MB RAM, 480 MHz CPU, Art Accelerator, L1 cache, external memory interface, large set of peripherals, SMPS", Manufacturer_Name=STMicroelectronics, Copyright="Copyright (C) 2025 Ultra Librarian. All rights reserved.", Datasheet=https://www.st.com/resource/en/datasheet/stm32h745zg.pdf, Manufacturer_Part_Number=STM32H745XIH6, RefDes=RefDes, Type=Type
U2: "DRAM 128M, 3.3V, SDRAM, 4Mx32, 166Mhz, 90 ball BGA (8mmx13mm) RoHS", Manufacturer_Name="Integrated Silicon Solution Inc.", Arrow Part Number=IS42S32400J-6BL, Arrow Price/Stock=https://www.arrow.com/en/products/is42s32400j-6bl/integrated-silicon-solution-inc?utm_currency=USD&region=nac, Datasheet Link=https://www.issi.com/WW/pdf/42-45S32400J.pdf, Geometry.Height=1.2mm, Manufacturer_Part_Number=IS42S32400J-6BL
U4: "MRAM Avalanche High Performance Serial P-SRAM 4Mb in SOIC8 package with QSPI - 108MHz interface, 3V, -40 C to 105 C", Manufacturer_Name="Avalanche Technology", Mouser Part Number=793-30042040108X0PSY, Datasheet Link=https://www.mouser.ph/ProductDetail/Avalanche-Technology/AS3004204-0108X0PSAY?qs=eP2BKZSCXI7G0ggegRejGg%3D%3D, Geometry.Height=2.16mm, Manufacturer_Part_Number=AS3004204-0108X0PSAY, Mouser Price/Stock=https://www.mouser.co.uk/ProductDetail/Avalanche-Technology/AS3004204-0108X0PSAY/?qs=eP2BKZSCXI7G0ggegRejGg%3D%3D
U5: "3.3 V CAN Transceiver with Standby Mode", Package="SOIC-8 Texas Instruments", Check_prices=https://www.snapeda.com/parts/SN65HVD230DR/Texas+Instruments/view-part/?ref=eda, MF="Texas Instruments", MP=SN65HVD230DR, SnapEDA_Link=https://www.snapeda.com/parts/SN65HVD230DR/Texas+Instruments/view-part/?ref=snap
U6 U7: "Automotive LVDS Differential Driver"
U10: "5.5V to 36V Input, 3A, 500kHz Step-Down Converter", Package="HSOIC-8 Texas Instruments", Availability="In Stock", Check_prices=https://www.snapeda.com/parts/TPS5430DDAR/Texas+Instruments/view-part/?ref=eda, MF="Texas Instruments", MP=TPS5430DDAR, Price=None, Purchase-URL=https://pricing.snapeda.com/search/part/TPS5430DDAR/?ref=eda, SnapEDA_Link=https://www.snapeda.com/parts/TPS5430DDAR/Texas+Instruments/view-part/?ref=snap
U14: "No Description Available", Manufacturer_Name=ISSI, Copyright="Copyright (C) 2025 Ultra Librarian. All rights reserved.", Manufacturer_Part_Number=IS66WVS4M8BLL-104NLI, RefDes=RefDes, Type=Memory
U15: "OSC PROG TIMER TSOT23-6"
U16 U17 U18: "No Description Available", Manufacturer_Name=Microchip, Copyright="Copyright (C) 2025 Ultra Librarian. All rights reserved.", Manufacturer_Part_Number=TC1047AVNBTR, RefDes=RefDes, Type=Type
X1: library part XT4, "Crystal, 25 MHz, -30 to 85 degC, 3.2 x 2.5 x 0.9 mm SMD"
X2: "32.768 kHz +/-20ppm Crystal 12pF 70 kOhms 2-SMD, No Lead , -40C ~ 85C", Manufacturer_Name=Vishay, Mouser Part Number=70-XT1312HHRXX32K76E, Datasheet Link=https://www.vishay.com/docs/35071/xt13.pdf, Geometry.Height=0.8mm, Manufacturer_Part_Number=XT1312HHRXX32K76E, Mouser Price/Stock=https://www.mouser.co.uk/ProductDetail/Vishay-Dale/XT1312HHRXX32K76E?qs=jcD%2FCkGBYeMqyUz9UpSqCw%3D%3D

## Via types
v1: diameter 0.4, hole 0.2, Top Layer to Bottom Layer, tented both sides, 1084 vias
v2: diameter 0.35, hole 0.2, Top Layer to Bottom Layer, tented both sides, 6 vias